# EAGLE board icyradio (EAGLE 9.5.1), part 1 of 3
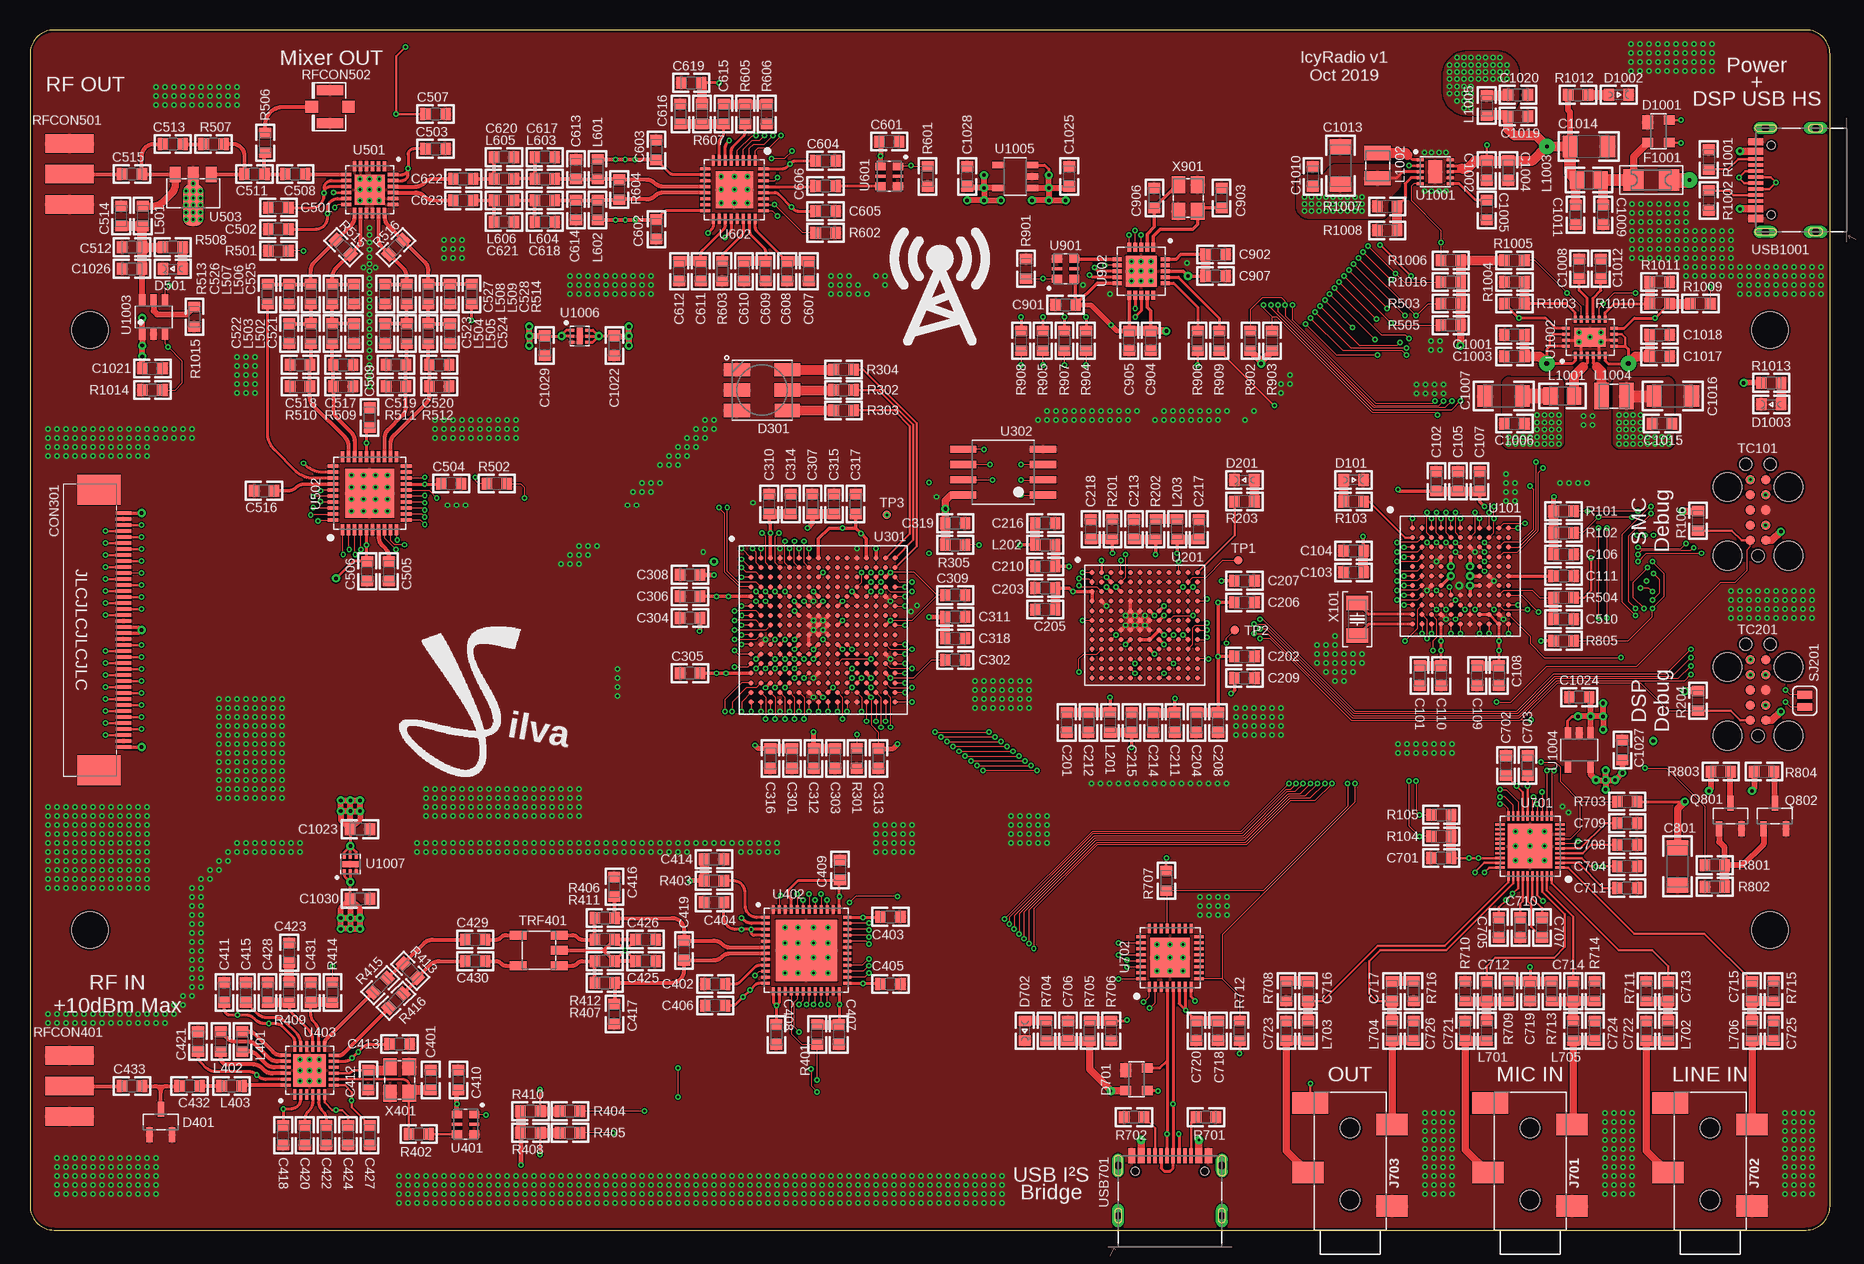
[diagram p0: board, top side]
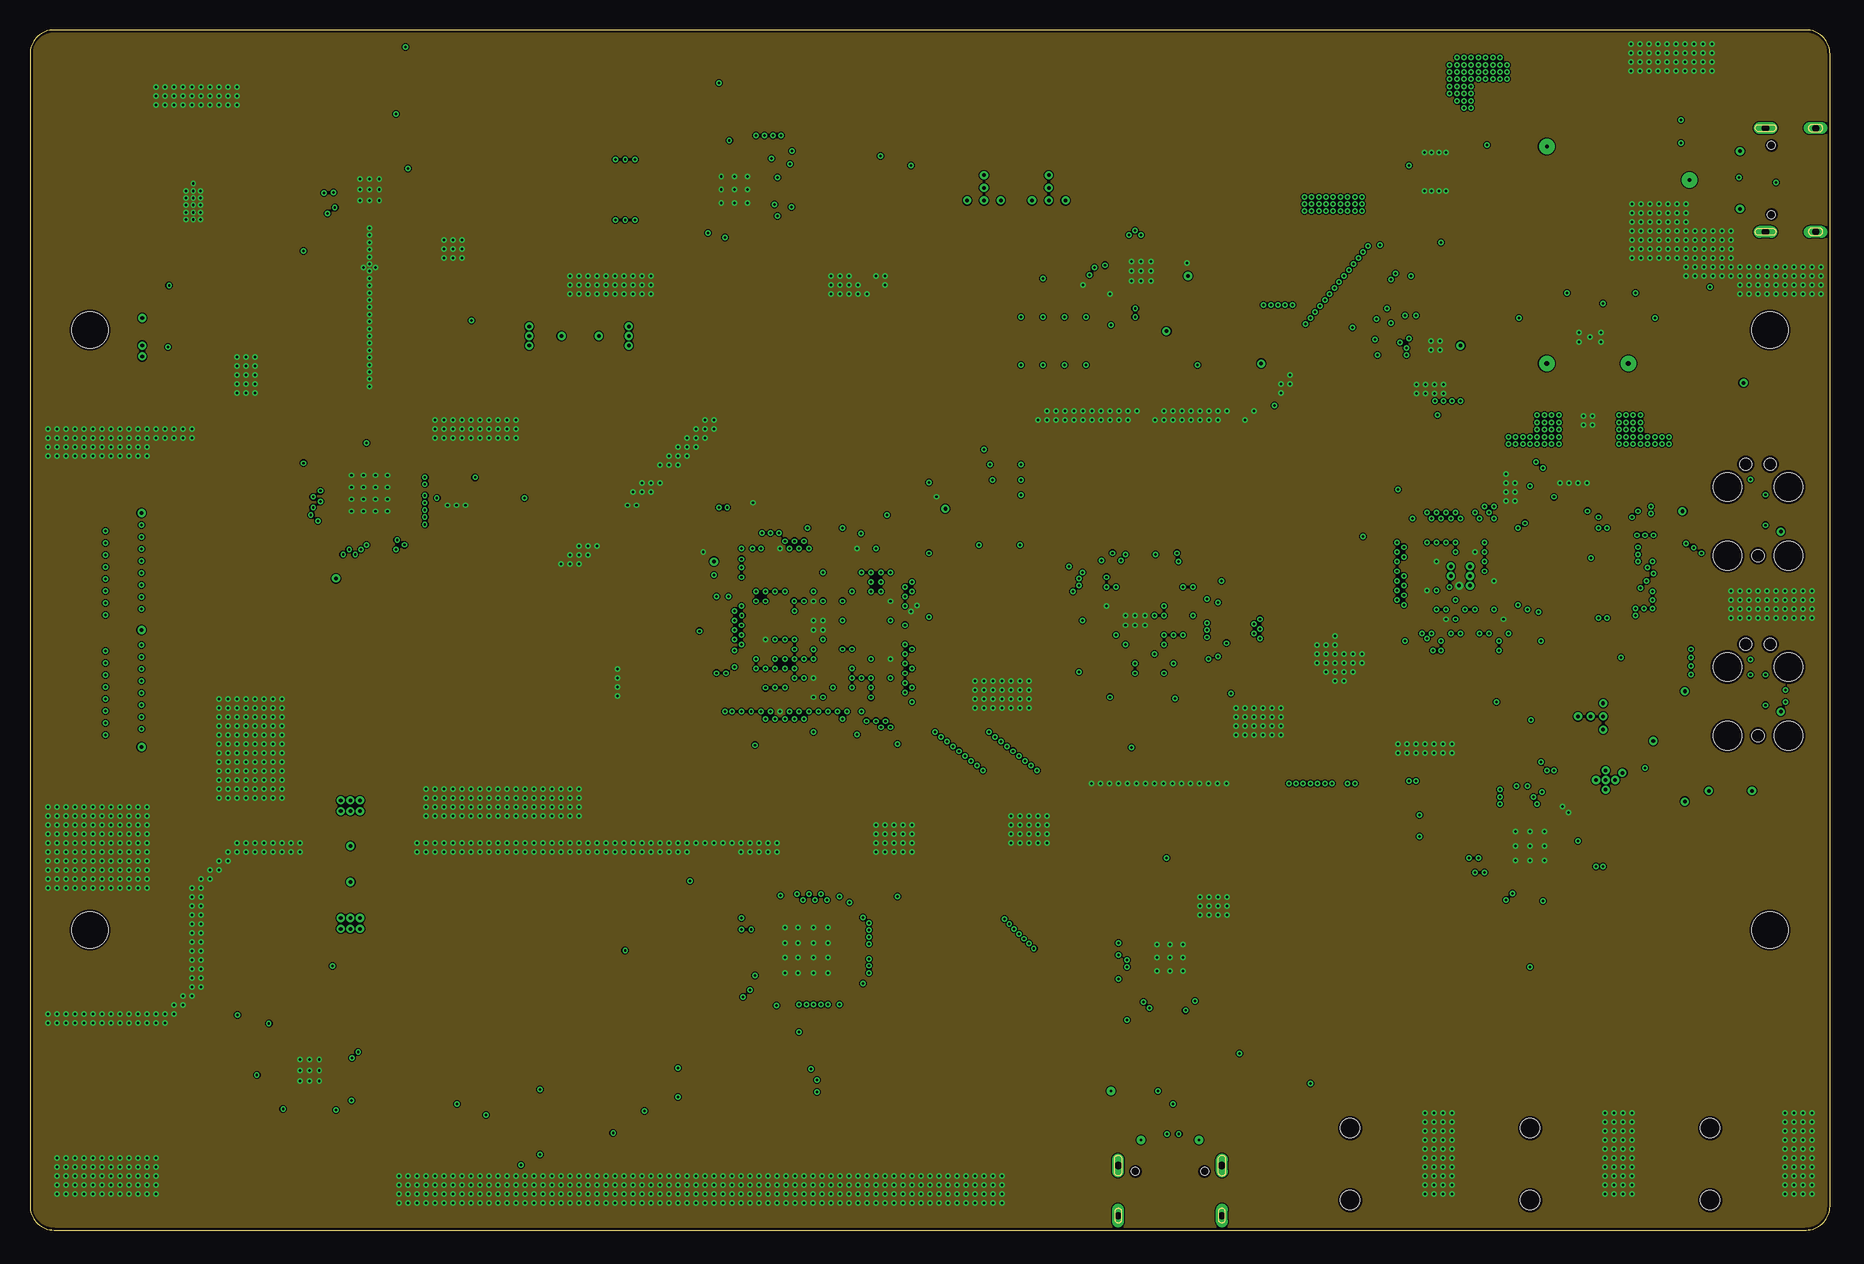
[diagram p1: board, inner layer Route2]
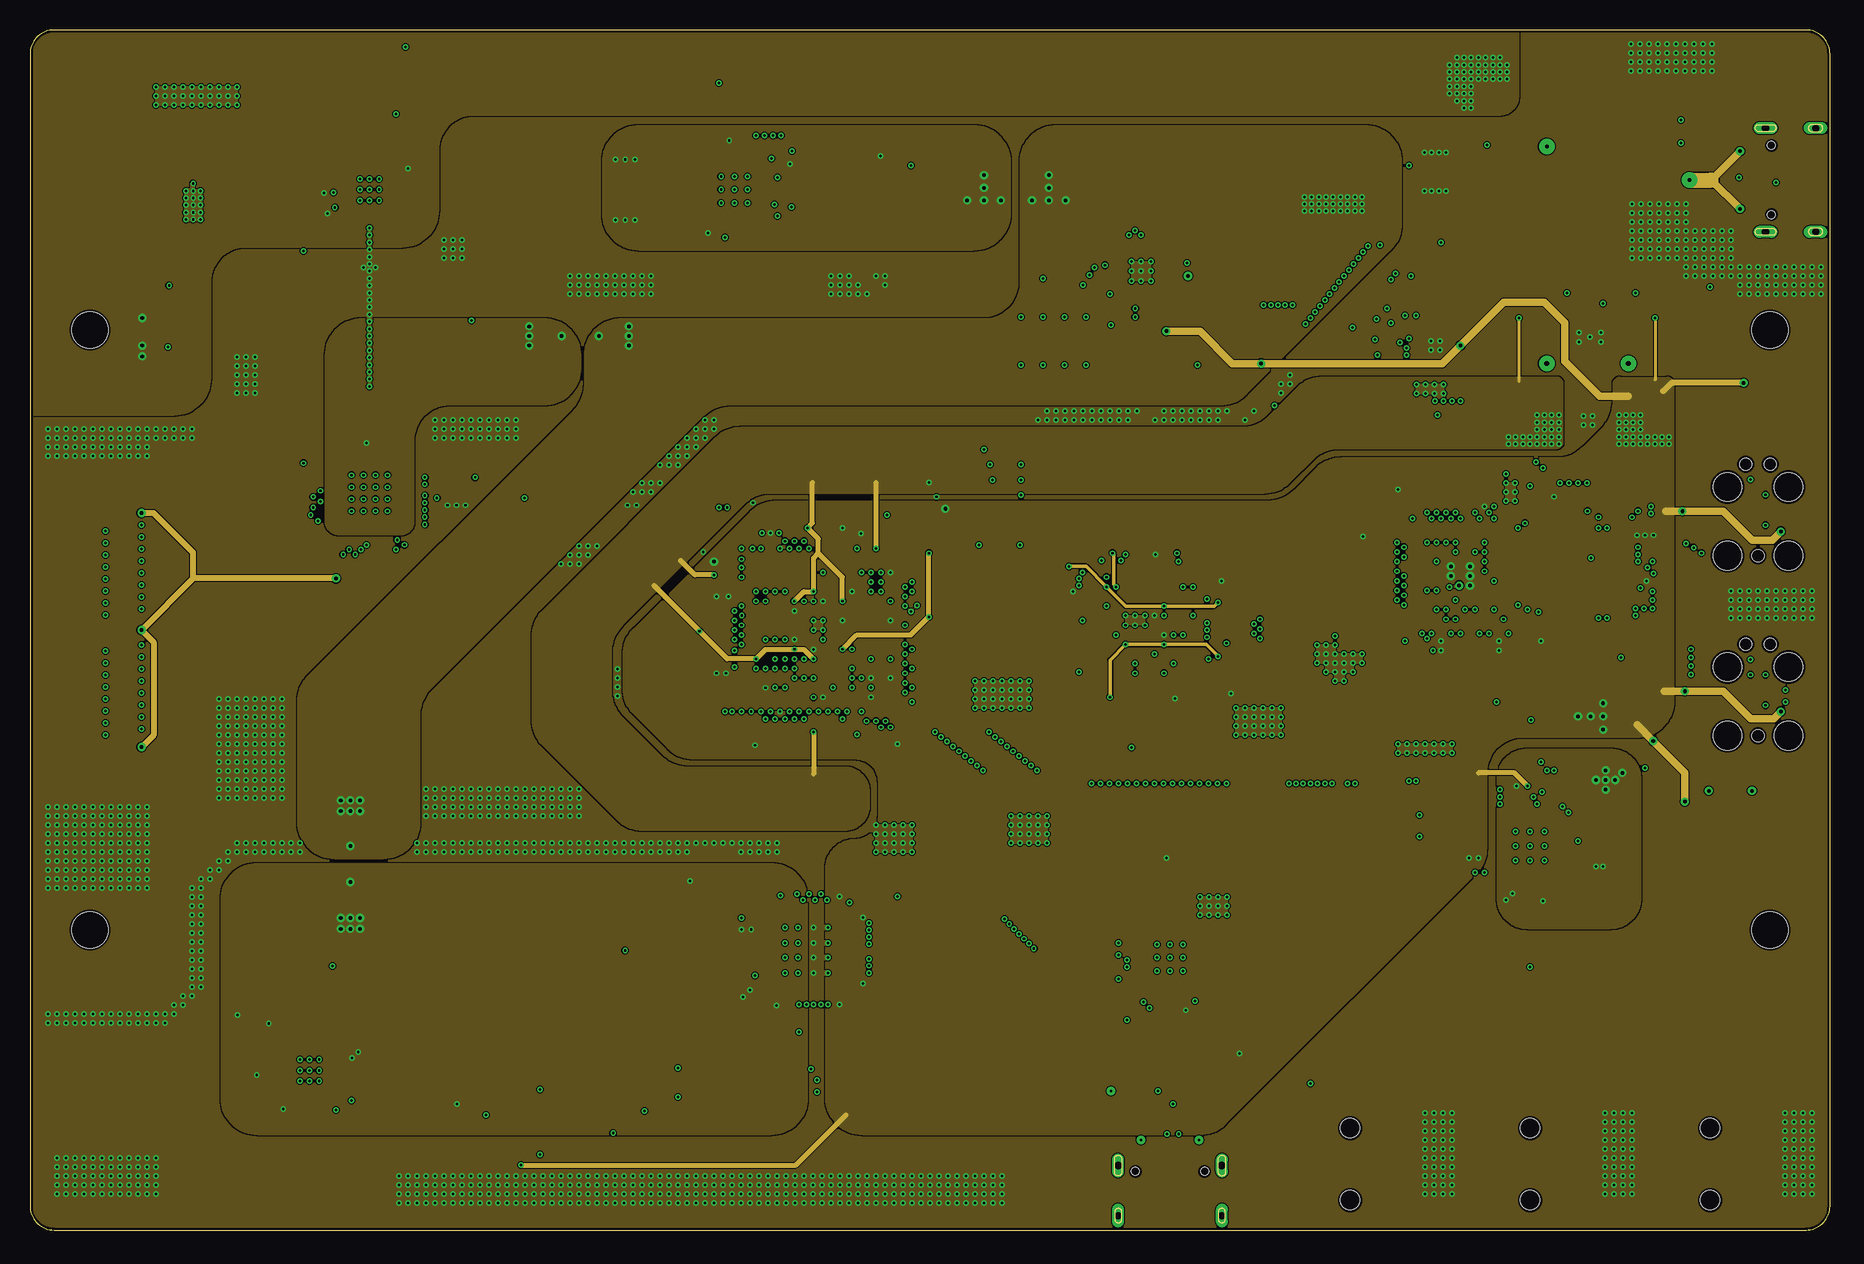
[diagram p2: board, inner layer Route15]
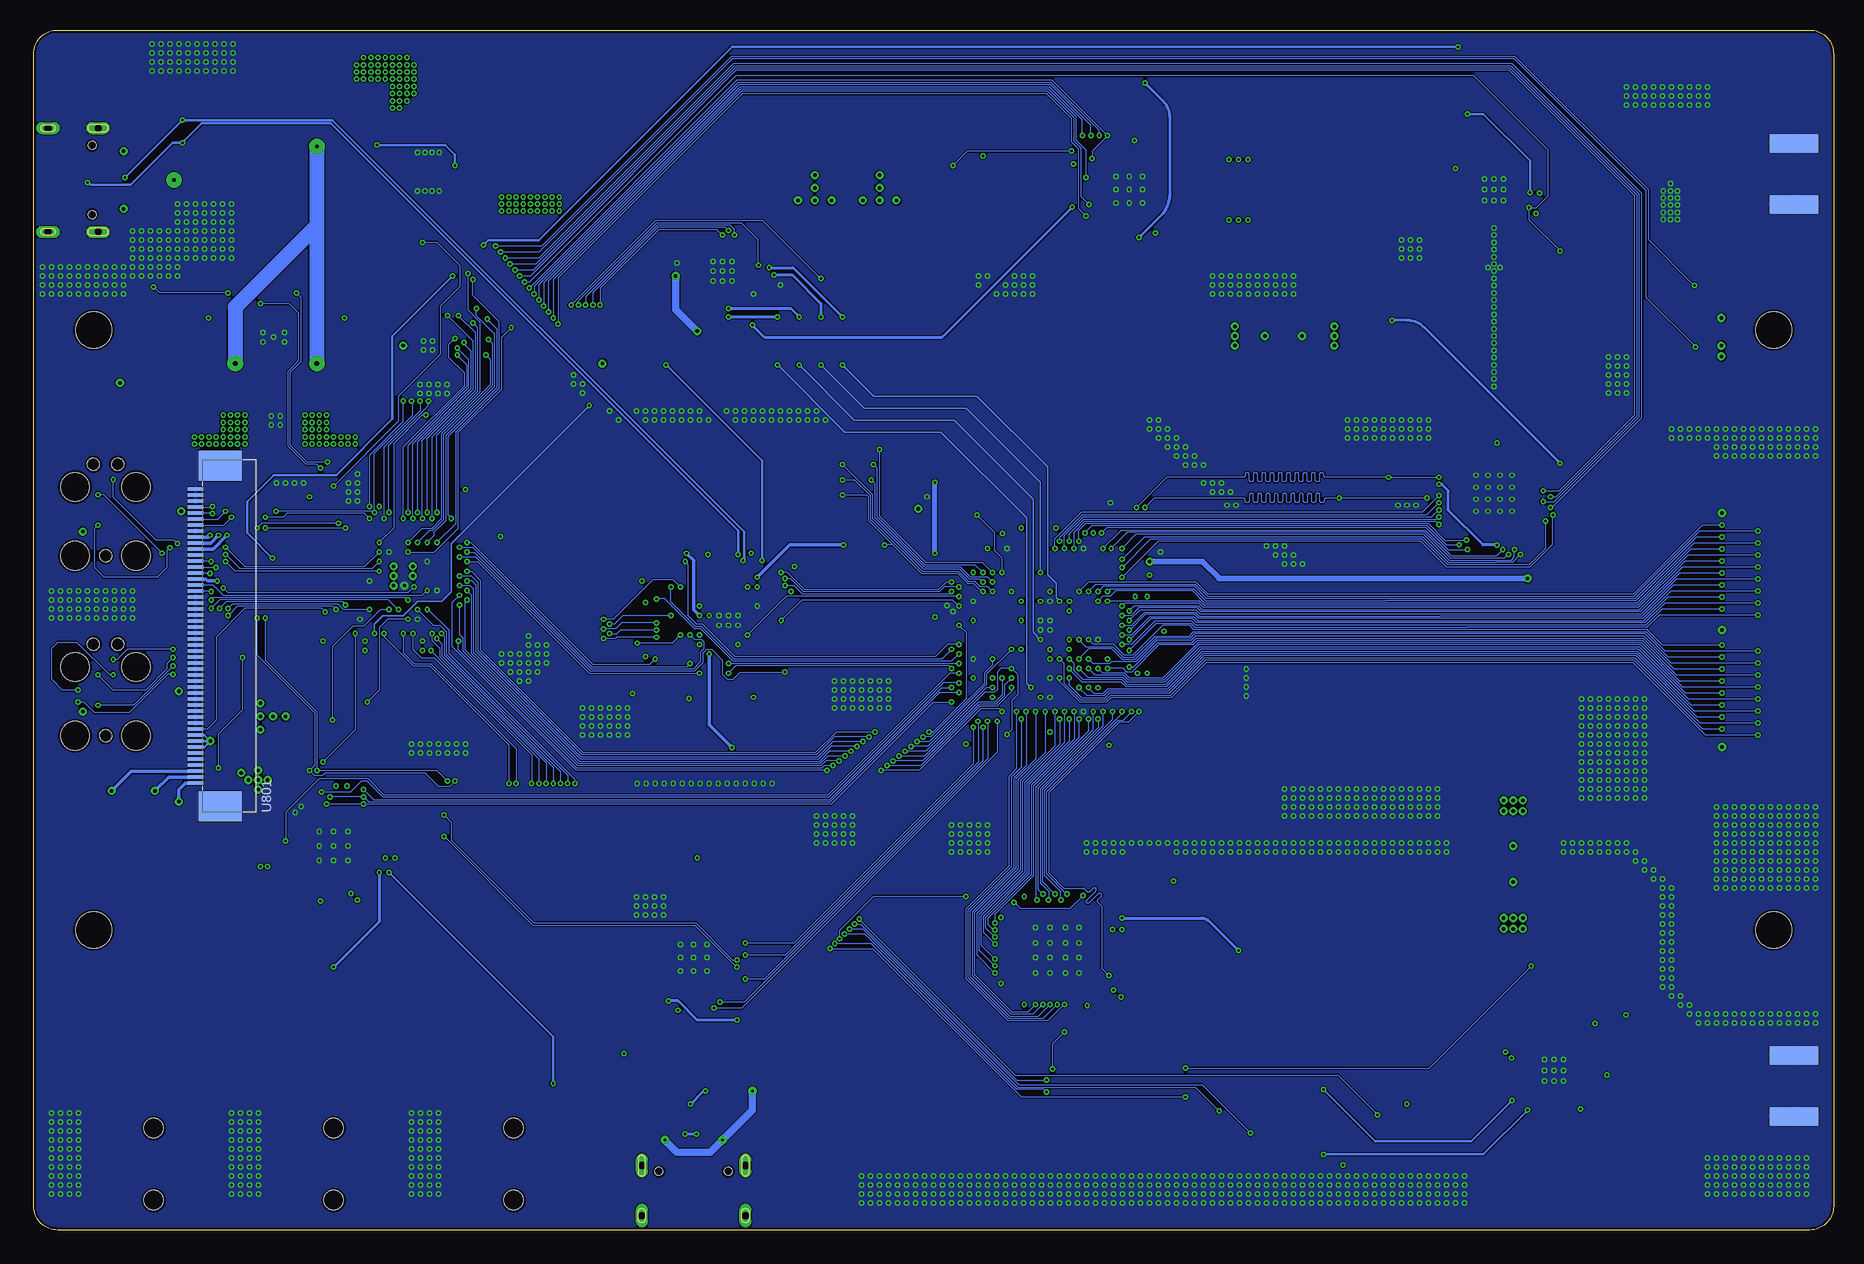
[diagram p3: board, bottom side, seen from below]

Size 150 x 100 mm. Coordinates in mm from the lower left corner, seen from the top.
Outline: 0,98 0,2 arc90 2,0 148,0 arc90 150,2 150,98 arc90 148,100 2,100 arc90 0,98
Copper layers (1+2*15+16): Top 0.035mm / dielectric 0.2mm / Route2 0.0175mm / dielectric 0.665mm / Route15 0.0175mm / dielectric 0.2mm / Bottom 0.035mm
Design rules "jlcpcb_4layer *": minimum track width 3.5mil, minimum drill 0.2mm, track to track 3.5mil, track to pad 3.5mil, pad to pad 3.5mil, via to via 5mil, smd to smd 3.5mil, copper to edge 0.2mm, drill to drill 5mil, minimum pad ring 3mil, minimum via ring 3mil, stop-mask expansion 0.075mm, vias tented up to drill 10mm, thermal gap 3.5mil
Holes 3 mm at 145,25 145,75 5,25 5,75

## Footprints (pad centres in the part's own frame; a part is rotated, then mirrored left to right if it is on the bottom)
CAP0603 = smd 0.889 x 1.016: 1 -0.819,0; 2 0.819,0
CAP1206 = smd 1.27 x 1.778: 1 -1.549,0; 2 1.549,0
FPC-40P = smd 0.3 x 1.3: 1 -9.75,3.5; 2 -9.25,3.5; 3 -8.75,3.5; 4 -8.25,3.5; 5 -7.75,3.5; 6 -7.25,3.5; 7 -6.75,3.5; 8 -6.25,3.5; 9 -5.75,3.5; 10 -5.25,3.5; 11 -4.75,3.5; 12 -4.25,3.5; 13 -3.75,3.5; 14 -3.25,3.5; 15 -2.75,3.5; 16 -2.25,3.5; 17 -1.75,3.5; 18 -1.25,3.5; 19 -0.75,3.5; 20 -0.25,3.5; 21 0.25,3.5; 22 0.75,3.5; 23 1.25,3.5; 24 1.75,3.5; 25 2.25,3.5; 26 2.75,3.5; 27 3.25,3.5; 28 3.75,3.5; 29 4.25,3.5; 30 4.75,3.5; 31 5.25,3.5; 32 5.75,3.5; 33 6.25,3.5; 34 6.75,3.5; 35 7.25,3.5; 36 7.75,3.5; 37 8.25,3.5; 38 8.75,3.5; 39 9.25,3.5; 40 9.75,3.5 | smd 2.5 x 3.6: M1 11.69,1.45; M2 -11.69,1.45
0603 = smd 0.889 x 1.016: 1 -0.819,0; 2 0.819,0
5050 = smd 2.1 x 1.1: 1 -2.1,1.7 | smd 2.2 x 1.1: 2 -2.1,0; 3 -2.1,-1.7; 4 2.1,-1.7; 5 2.1,0; 6 2.1,1.7
SOT23 = smd 1.219 x 0.533: 1 -1.067,0.94; 2 -1.067,-0.94; 3 1.067,0
SOT143 = smd 1.2 x 0.9: 1 -0.711,-0.889 | smd 0.8 x 0.9: 2 0.989,-0.889; 3 0.989,0.911; 4 -0.911,0.911
1206 = smd 1.7 x 1.803: 1 -1.472,0; 2 1.472,0
3.5TRSJACK = smd 1.8 x 2.6: 1 2,-3.5; 2 8.8,-3.5; 3 4.8,3.5 | smd 1.8 x 3: 4 10.6,3.3 | hole 1.6: 2.5,0; 8.5,0
IND0603 = smd 0.889 x 1.016: 1 -0.819,0; 2 0.819,0
IND0805 = smd 1.245 x 1.473: 1 -0.965,0; 2 0.965,0
IND2520 = smd 2.2 x 1.2: 1 0,-1.05; 2 0,1.05
RES0603 = smd 0.889 x 1.016: 1 -0.819,0; 2 0.819,0
SMA-EDGE = smd 1.524 x 4.064: GND@0 -2.54,0; GND@1 2.54,0; SIG 0,0 | smd 1.524 x 4.064 bottom: GND@2 -2.54,0; GND@3 2.54,0
U.FL = smd 2.2 x 0.85: P$1 0,1.375; P$2 0,-1.375 | smd 1.05 x 1: P$3 1.525,0; P$4 -1.525,0
SJ_S = smd 0.635 x 1.27: 1 -0.508,0; 2 0.508,0
TC2050-IDC = smd 0.787 x 0.787: 1 -2.54,-0.635; 2 -1.27,-0.635; 3 0,-0.635; 4 1.27,-0.635; 5 2.54,-0.635; 6 2.54,0.635; 7 1.27,0.635; 8 0,0.635; 9 -1.27,0.635; 10 -2.54,0.635 | hole 0.991: -3.81,0; 3.81,1.016; 3.81,-1.016 | hole 2.375: -3.81,2.54; -3.81,-2.54; 1.905,2.54; 1.905,-2.54
PAD0.7MM = smd 0.7 x 0.7: TP 0,0
TRF-SM-22 = smd 0.76 x 1.4: 1 -1.27,1.715; 2 0,1.715; 3 1.27,1.715; 4 1.27,-1.715; 5 -1.27,-1.715
BGA112 = smd 0.406 x 0.406: A1 -4,4; A2 -3.2,4; A3 -2.4,4; A4 -1.6,4; A5 -0.8,4; A6 0,4; A7 0.8,4; A8 1.6,4; A9 2.4,4; A10 3.2,4; A11 4,4; B1 -4,3.2; B2 -3.2,3.2; B3 -2.4,3.2; B4 -1.6,3.2; B5 -0.8,3.2; B6 0,3.2; B7 0.8,3.2; B8 1.6,3.2; B9 2.4,3.2; B10 3.2,3.2; B11 4,3.2; C1 -4,2.4; C2 -3.2,2.4; C3 -2.4,2.4; C4 -1.6,2.4; C5 -0.8,2.4; C6 0,2.4; C7 0.8,2.4; C8 1.6,2.4; C9 2.4,2.4; C10 3.2,2.4; C11 4,2.4; D1 -4,1.6; D2 -3.2,1.6; D3 -2.4,1.6; D4 -1.6,1.6; D5 -0.8,1.6; D6 0,1.6; D7 0.8,1.6; D8 1.6,1.6; D9 2.4,1.6; D10 3.2,1.6; D11 4,1.6; E1 -4,0.8; E2 -3.2,0.8; E3 -2.4,0.8; E4 -1.6,0.8; E8 1.6,0.8; E9 2.4,0.8; E10 3.2,0.8; E11 4,0.8; F1 -4,0; F2 -3.2,0; F3 -2.4,0; F4 -1.6,0; F8 1.6,0; F9 2.4,0; F10 3.2,0; F11 4,0; G1 -4,-0.8; G2 -3.2,-0.8; G3 -2.4,-0.8; G4 -1.6,-0.8; G8 1.6,-0.8; G9 2.4,-0.8; G10 3.2,-0.8; G11 4,-0.8; H1 -4,-1.6; H2 -3.2,-1.6; H3 -2.4,-1.6; H4 -1.6,-1.6; H5 -0.8,-1.6; H6 0,-1.6; H7 0.8,-1.6; H8 1.6,-1.6; H9 2.4,-1.6; H10 3.2,-1.6; H11 4,-1.6; J1 -4,-2.4; J2 -3.2,-2.4; J3 -2.4,-2.4; J4 -1.6,-2.4; J5 -0.8,-2.4; J6 0,-2.4; J7 0.8,-2.4; J8 1.6,-2.4; J9 2.4,-2.4; J10 3.2,-2.4; J11 4,-2.4; K1 -4,-3.2; K2 -3.2,-3.2; K3 -2.4,-3.2; K4 -1.6,-3.2; K5 -0.8,-3.2; K6 0,-3.2; K7 0.8,-3.2; K8 1.6,-3.2; K9 2.4,-3.2; K10 3.2,-3.2; K11 4,-3.2; L1 -4,-4; L2 -3.2,-4; L3 -2.4,-4; L4 -1.6,-4; L5 -0.8,-4; L6 0,-4; L7 0.8,-4; L8 1.6,-4; L9 2.4,-4; L10 3.2,-4; L11 4,-4
LFBGA144 = smd 0.406 x 0.406: A1 -4.4,4.4; A2 -3.6,4.4; A3 -2.8,4.4; A4 -2,4.4; A5 -1.2,4.4; A6 -0.4,4.4; A7 0.4,4.4; A8 1.2,4.4; A9 2,4.4; A10 2.8,4.4; A11 3.6,4.4; A12 4.4,4.4; B1 -4.4,3.6; B2 -3.6,3.6; B3 -2.8,3.6; B4 -2,3.6; B5 -1.2,3.6; B6 -0.4,3.6; B7 0.4,3.6; B8 1.2,3.6; B9 2,3.6; B10 2.8,3.6; B11 3.6,3.6; B12 4.4,3.6; C1 -4.4,2.8; C2 -3.6,2.8; C3 -2.8,2.8; C4 -2,2.8; C5 -1.2,2.8; C6 -0.4,2.8; C7 0.4,2.8; C8 1.2,2.8; C9 2,2.8; C10 2.8,2.8; C11 3.6,2.8; C12 4.4,2.8; D1 -4.4,2; D2 -3.6,2; D3 -2.8,2; D4 -2,2; D5 -1.2,2; D6 -0.4,2; D7 0.4,2; D8 1.2,2; D9 2,2; D10 2.8,2; D11 3.6,2; D12 4.4,2; E1 -4.4,1.2; E2 -3.6,1.2; E3 -2.8,1.2; E4 -2,1.2; E5 -1.2,1.2; E6 -0.4,1.2; E7 0.4,1.2; E8 1.2,1.2; E9 2,1.2; E10 2.8,1.2; E11 3.6,1.2; E12 4.4,1.2; F1 -4.4,0.4; F2 -3.6,0.4; F3 -2.8,0.4; F4 -2,0.4; F5 -1.2,0.4; F6 -0.4,0.4; F7 0.4,0.4; F8 1.2,0.4; F9 2,0.4; F10 2.8,0.4; F11 3.6,0.4; F12 4.4,0.4; G1 -4.4,-0.4; G2 -3.6,-0.4; G3 -2.8,-0.4; G4 -2,-0.4; G5 -1.2,-0.4; G6 -0.4,-0.4; G7 0.4,-0.4; G8 1.2,-0.4; G9 2,-0.4; G10 2.8,-0.4; G11 3.6,-0.4; G12 4.4,-0.4; H1 -4.4,-1.2; H2 -3.6,-1.2; H3 -2.8,-1.2; H4 -2,-1.2; H5 -1.2,-1.2; H6 -0.4,-1.2; H7 0.4,-1.2; H8 1.2,-1.2; H9 2,-1.2; H10 2.8,-1.2; H11 3.6,-1.2; H12 4.4,-1.2; J1 -4.4,-2; J2 -3.6,-2; J3 -2.8,-2; J4 -2,-2; J5 -1.2,-2; J6 -0.4,-2; J7 0.4,-2; J8 1.2,-2; J9 2,-2; J10 2.8,-2; J11 3.6,-2; J12 4.4,-2; K1 -4.4,-2.8; K2 -3.6,-2.8; K3 -2.8,-2.8; K4 -2,-2.8; K5 -1.2,-2.8; K6 -0.4,-2.8; K7 0.4,-2.8; K8 1.2,-2.8; K9 2,-2.8; K10 2.8,-2.8; K11 3.6,-2.8; K12 4.4,-2.8; L1 -4.4,-3.6; L2 -3.6,-3.6; L3 -2.8,-3.6; L4 -2,-3.6; L5 -1.2,-3.6; L6 -0.4,-3.6; L7 0.4,-3.6; L8 1.2,-3.6; L9 2,-3.6; L10 2.8,-3.6; L11 3.6,-3.6; L12 4.4,-3.6; M1 -4.4,-4.4; M2 -3.6,-4.4; M3 -2.8,-4.4; M4 -2,-4.4; M5 -1.2,-4.4; M6 -0.4,-4.4; M7 0.4,-4.4; M8 1.2,-4.4; M9 2,-4.4; M10 2.8,-4.4; M11 3.6,-4.4; M12 4.4,-4.4
CABGA256 = smd 0.406 x 0.406: A1 -6,6; A2 -5.2,6; A3 -4.4,6; A4 -3.6,6; A5 -2.8,6; A6 -2,6; A7 -1.2,6; A8 -0.4,6; A9 0.4,6; A10 1.2,6; A11 2,6; A12 2.8,6; A13 3.6,6; A14 4.4,6; A15 5.2,6; A16 6,6; B1 -6,5.2; B2 -5.2,5.2; B3 -4.4,5.2; B4 -3.6,5.2; B5 -2.8,5.2; B6 -2,5.2; B7 -1.2,5.2; B8 -0.4,5.2; B9 0.4,5.2; B10 1.2,5.2; B11 2,5.2; B12 2.8,5.2; B13 3.6,5.2; B14 4.4,5.2; B15 5.2,5.2; B16 6,5.2; C1 -6,4.4; C2 -5.2,4.4; C3 -4.4,4.4; C4 -3.6,4.4; C5 -2.8,4.4; C6 -2,4.4; C7 -1.2,4.4; C8 -0.4,4.4; C9 0.4,4.4; C10 1.2,4.4; C11 2,4.4; C12 2.8,4.4; C13 3.6,4.4; C14 4.4,4.4; C15 5.2,4.4; C16 6,4.4; D1 -6,3.6; D2 -5.2,3.6; D3 -4.4,3.6; D4 -3.6,3.6; D5 -2.8,3.6; D6 -2,3.6; D7 -1.2,3.6; D8 -0.4,3.6; D9 0.4,3.6; D10 1.2,3.6; D11 2,3.6; D12 2.8,3.6; D13 3.6,3.6; D14 4.4,3.6; D15 5.2,3.6; D16 6,3.6; E1 -6,2.8; E2 -5.2,2.8; E3 -4.4,2.8; E4 -3.6,2.8; E5 -2.8,2.8; E6 -2,2.8; E7 -1.2,2.8; E8 -0.4,2.8; E9 0.4,2.8; E10 1.2,2.8; E11 2,2.8; E12 2.8,2.8; E13 3.6,2.8; E14 4.4,2.8; E15 5.2,2.8; E16 6,2.8; F1 -6,2; F2 -5.2,2; F3 -4.4,2; F4 -3.6,2; F5 -2.8,2; F6 -2,2; F7 -1.2,2; F8 -0.4,2; F9 0.4,2; F10 1.2,2; F11 2,2; F12 2.8,2; F13 3.6,2; F14 4.4,2; F15 5.2,2; F16 6,2; G1 -6,1.2; G2 -5.2,1.2; G3 -4.4,1.2; G4 -3.6,1.2; G5 -2.8,1.2; G6 -2,1.2; G7 -1.2,1.2; G8 -0.4,1.2; G9 0.4,1.2; G10 1.2,1.2; G11 2,1.2; G12 2.8,1.2; G13 3.6,1.2; G14 4.4,1.2; G15 5.2,1.2; G16 6,1.2; H1 -6,0.4; H2 -5.2,0.4; H3 -4.4,0.4; H4 -3.6,0.4; H5 -2.8,0.4; H6 -2,0.4; H7 -1.2,0.4; H8 -0.4,0.4; H9 0.4,0.4; H10 1.2,0.4; H11 2,0.4; H12 2.8,0.4; H13 3.6,0.4; H14 4.4,0.4; H15 5.2,0.4; H16 6,0.4; J1 -6,-0.4; J2 -5.2,-0.4; J3 -4.4,-0.4; J4 -3.6,-0.4; J5 -2.8,-0.4; J6 -2,-0.4; J7 -1.2,-0.4; J8 -0.4,-0.4; J9 0.4,-0.4; J10 1.2,-0.4; J11 2,-0.4; J12 2.8,-0.4; J13 3.6,-0.4; J14 4.4,-0.4; J15 5.2,-0.4; J16 6,-0.4; K1 -6,-1.2; K2 -5.2,-1.2; K3 -4.4,-1.2; K4 -3.6,-1.2; K5 -2.8,-1.2; K6 -2,-1.2; K7 -1.2,-1.2; K8 -0.4,-1.2; K9 0.4,-1.2; K10 1.2,-1.2; K11 2,-1.2; K12 2.8,-1.2; K13 3.6,-1.2; K14 4.4,-1.2; K15 5.2,-1.2; K16 6,-1.2; L1 -6,-2; L2 -5.2,-2; L3 -4.4,-2; L4 -3.6,-2; L5 -2.8,-2; L6 -2,-2; L7 -1.2,-2; L8 -0.4,-2; L9 0.4,-2; L10 1.2,-2; L11 2,-2; L12 2.8,-2; L13 3.6,-2; L14 4.4,-2; L15 5.2,-2; L16 6,-2; M1 -6,-2.8; M2 -5.2,-2.8; M3 -4.4,-2.8; M4 -3.6,-2.8; M5 -2.8,-2.8; M6 -2,-2.8; M7 -1.2,-2.8; M8 -0.4,-2.8; M9 0.4,-2.8; M10 1.2,-2.8; M11 2,-2.8; M12 2.8,-2.8; M13 3.6,-2.8; M14 4.4,-2.8; M15 5.2,-2.8; M16 6,-2.8; N1 -6,-3.6; N2 -5.2,-3.6; N3 -4.4,-3.6; N4 -3.6,-3.6; N5 -2.8,-3.6; N6 -2,-3.6; N7 -1.2,-3.6; N8 -0.4,-3.6; N9 0.4,-3.6; N10 1.2,-3.6; N11 2,-3.6; N12 2.8,-3.6; N13 3.6,-3.6; N14 4.4,-3.6; N15 5.2,-3.6; N16 6,-3.6; P1 -6,-4.4; P2 -5.2,-4.4; P3 -4.4,-4.4; P4 -3.6,-4.4; P5 -2.8,-4.4; P6 -2,-4.4; P7 -1.2,-4.4; P8 -0.4,-4.4; P9 0.4,-4.4; P10 1.2,-4.4; P11 2,-4.4; P12 2.8,-4.4; P13 3.6,-4.4; P14 4.4,-4.4; P15 5.2,-4.4; P16 6,-4.4; R1 -6,-5.2; R2 -5.2,-5.2; R3 -4.4,-5.2; R4 -3.6,-5.2; R5 -2.8,-5.2; R6 -2,-5.2; R7 -1.2,-5.2; R8 -0.4,-5.2; R9 0.4,-5.2; R10 1.2,-5.2; R11 2,-5.2; R12 2.8,-5.2; R13 3.6,-5.2; R14 4.4,-5.2; R15 5.2,-5.2; R16 6,-5.2; T1 -6,-6; T2 -5.2,-6; T3 -4.4,-6; T4 -3.6,-6; T5 -2.8,-6; T6 -2,-6; T7 -1.2,-6; T8 -0.4,-6; T9 0.4,-6; T10 1.2,-6; T11 2,-6; T12 2.8,-6; T13 3.6,-6; T14 4.4,-6; T15 5.2,-6; T16 6,-6
WSOIC8 = smd 0.6 x 2.2: 1 -1.905,-3.33; 2 -0.635,-3.33; 3 0.635,-3.33; 4 1.905,-3.33; 5 1.905,3.33; 6 0.635,3.33; 7 -0.635,3.33; 8 -1.905,3.33
VDFN6 = smd 0.65 x 0.85: 1 -0.83,0.725; 3 0.83,0.725; 4 0.83,-0.725; 6 -0.83,-0.725 | smd 0.25 x 0.85: 2 0,0.725; 5 0,-0.725
QFN48 = smd 0.7 x 0.25: 1 -3.4,2.75; 2 -3.4,2.25; 3 -3.4,1.75; 4 -3.4,1.25; 5 -3.4,0.75; 6 -3.4,0.25; 7 -3.4,-0.25; 8 -3.4,-0.75; 9 -3.4,-1.25; 10 -3.4,-1.75; 11 -3.4,-2.25; 12 -3.4,-2.75; 25 3.4,-2.75; 26 3.4,-2.25; 27 3.4,-1.75; 28 3.4,-1.25; 29 3.4,-0.75; 30 3.4,-0.25; 31 3.4,0.25; 32 3.4,0.75; 33 3.4,1.25; 34 3.4,1.75; 35 3.4,2.25; 36 3.4,2.75 | smd 0.25 x 0.7: 13 -2.75,-3.4; 14 -2.25,-3.4; 15 -1.75,-3.4; 16 -1.25,-3.4; 17 -0.75,-3.4; 18 -0.25,-3.4; 19 0.25,-3.4; 20 0.75,-3.4; 21 1.25,-3.4; 22 1.75,-3.4; 23 2.25,-3.4; 24 2.75,-3.4; 37 2.75,3.4; 38 2.25,3.4; 39 1.75,3.4; 40 1.25,3.4; 41 0.75,3.4; 42 0.25,3.4; 43 -0.25,3.4; 44 -0.75,3.4; 45 -1.25,3.4; 46 -1.75,3.4; 47 -2.25,3.4; 48 -2.75,3.4 | smd 5.15 x 5.15: 49 0,0
QFN24 = smd 0.25 x 0.85: 1 -1.25,-2; 2 -0.75,-2; 3 -0.25,-2; 4 0.25,-2; 5 0.75,-2; 6 1.25,-2; 13 1.25,2; 14 0.75,2; 15 0.25,2; 16 -0.25,2; 17 -0.75,2; 18 -1.25,2 | smd 0.85 x 0.25: 7 2,-1.25; 8 2,-0.75; 9 2,-0.25; 10 2,0.25; 11 2,0.75; 12 2,1.25; 19 -2,1.25; 20 -2,0.75; 21 -2,0.25; 22 -2,-0.25; 23 -2,-0.75; 24 -2,-1.25 | smd 2.7 x 2.7: 33 0,0
QFN24' = smd 0.3 x 0.85: 1 -1.25,-1.95; 2 -0.75,-1.95; 3 -0.25,-1.95; 4 0.25,-1.95; 5 0.75,-1.95; 6 1.25,-1.95; 13 1.25,1.95; 14 0.75,1.95; 15 0.25,1.95; 16 -0.25,1.95; 17 -0.75,1.95; 18 -1.25,1.95 | smd 0.85 x 0.3: 7 1.95,-1.25; 8 1.95,-0.75; 9 1.95,-0.25; 10 1.95,0.25; 11 1.95,0.75; 12 1.95,1.25; 19 -1.95,1.25; 20 -1.95,0.75; 21 -1.95,0.25; 22 -1.95,-0.25; 23 -1.95,-0.75; 24 -1.95,-1.25 | smd 2.5 x 2.5: 33 0,0
QFN40 = smd 0.9 x 0.29: 1 -3.05,2.25; 2 -3.05,1.75; 3 -3.05,1.25; 4 -3.05,0.75; 5 -3.05,0.25; 6 -3.05,-0.25; 7 -3.05,-0.75; 8 -3.05,-1.25; 9 -3.05,-1.75; 10 -3.05,-2.25; 21 3.05,-2.25; 22 3.05,-1.75; 23 3.05,-1.25; 24 3.05,-0.75; 25 3.05,-0.25; 26 3.05,0.25; 27 3.05,0.75; 28 3.05,1.25; 29 3.05,1.75; 30 3.05,2.25 | smd 0.29 x 0.9: 11 -2.25,-3.05; 12 -1.75,-3.05; 13 -1.25,-3.05; 14 -0.75,-3.05; 15 -0.25,-3.05; 16 0.25,-3.05; 17 0.75,-3.05; 18 1.25,-3.05; 19 1.75,-3.05; 20 2.25,-3.05; 31 2.25,3.05; 32 1.75,3.05; 33 1.25,3.05; 34 0.75,3.05; 35 0.25,3.05; 36 -0.25,3.05; 37 -0.75,3.05; 38 -1.25,3.05; 39 -1.75,3.05; 40 -2.25,3.05 | smd 4.1 x 4.1: 41 0,0
SOT89 = smd 0.9 x 1.3: 1 -1.5,-1.562; 3 1.5,-1.562 | smd 0.9 x 1.5: 2 0,-1.462 | smd 1.733 x 3.5: 4 0,0.988
QFN32 = smd 0.86 x 0.26: 1 -2.435,1.75; 2 -2.435,1.25; 3 -2.435,0.75; 4 -2.435,0.25; 5 -2.435,-0.25; 6 -2.435,-0.75; 7 -2.435,-1.25; 8 -2.435,-1.75; 17 2.435,-1.75; 18 2.435,-1.25; 19 2.435,-0.75; 20 2.435,-0.25; 21 2.435,0.25; 22 2.435,0.75; 23 2.435,1.25; 24 2.435,1.75 | smd 0.26 x 0.86: 9 -1.75,-2.435; 10 -1.25,-2.435; 11 -0.75,-2.435; 12 -0.25,-2.435; 13 0.25,-2.435; 14 0.75,-2.435; 15 1.25,-2.435; 16 1.75,-2.435; 25 1.75,2.435; 26 1.25,2.435; 27 0.75,2.435; 28 0.25,2.435; 29 -0.25,2.435; 30 -0.75,2.435; 31 -1.25,2.435; 32 -1.75,2.435 | smd 3.1 x 3.1: 33 0,0
QFN40' = smd 0.8 x 0.2: 1 -2.5,1.8; 2 -2.5,1.4; 3 -2.5,1; 4 -2.5,0.6; 5 -2.5,0.2; 6 -2.5,-0.2; 7 -2.5,-0.6; 8 -2.5,-1; 9 -2.5,-1.4; 10 -2.5,-1.8; 21 2.5,-1.8; 22 2.5,-1.4; 23 2.5,-1; 24 2.5,-0.6; 25 2.5,-0.2; 26 2.5,0.2; 27 2.5,0.6; 28 2.5,1; 29 2.5,1.4; 30 2.5,1.8 | smd 0.2 x 0.8: 11 -1.8,-2.5; 12 -1.4,-2.5; 13 -1,-2.5; 14 -0.6,-2.5; 15 -0.2,-2.5; 16 0.2,-2.5; 17 0.6,-2.5; 18 1,-2.5; 19 1.4,-2.5; 20 1.8,-2.5; 31 1.8,2.5; 32 1.4,2.5; 33 1,2.5; 34 0.6,2.5; 35 0.2,2.5; 36 -0.2,2.5; 37 -0.6,2.5; 38 -1,2.5; 39 -1.4,2.5; 40 -1.8,2.5 | smd 3.7 x 3.7: 41 0,0
QFN32' = smd 0.8 x 0.25: 1 -2.425,1.75; 2 -2.425,1.25; 3 -2.425,0.75; 4 -2.425,0.25; 5 -2.425,-0.25; 6 -2.425,-0.75; 7 -2.425,-1.25; 8 -2.425,-1.75; 17 2.425,-1.75; 18 2.425,-1.25; 19 2.425,-0.75; 20 2.425,-0.25; 21 2.425,0.25; 22 2.425,0.75; 23 2.425,1.25; 24 2.425,1.75 | smd 0.25 x 0.8: 9 -1.75,-2.425; 10 -1.25,-2.425; 11 -0.75,-2.425; 12 -0.25,-2.425; 13 0.25,-2.425; 14 0.75,-2.425; 15 1.25,-2.425; 16 1.75,-2.425; 25 1.75,2.425; 26 1.25,2.425; 27 0.75,2.425; 28 0.25,2.425; 29 -0.25,2.425; 30 -0.75,2.425; 31 -1.25,2.425; 32 -1.75,2.425 | smd 3.3 x 3.3: 33 0,0
FPC-50P = smd 0.3 x 1.3: 1 -12.25,3.5; 2 -11.75,3.5; 3 -11.25,3.5; 4 -10.75,3.5; 5 -10.25,3.5; 6 -9.75,3.5; 7 -9.25,3.5; 8 -8.75,3.5; 9 -8.25,3.5; 10 -7.75,3.5; 11 -7.25,3.5; 12 -6.75,3.5; 13 -6.25,3.5; 14 -5.75,3.5; 15 -5.25,3.5; 16 -4.75,3.5; 17 -4.25,3.5; 18 -3.75,3.5; 19 -3.25,3.5; 20 -2.75,3.5; 21 -2.25,3.5; 22 -1.75,3.5; 23 -1.25,3.5; 24 -0.75,3.5; 25 -0.25,3.5; 26 0.25,3.5; 27 0.75,3.5; 28 1.25,3.5; 29 1.75,3.5; 30 2.25,3.5; 31 2.75,3.5; 32 3.25,3.5; 33 3.75,3.5; 34 4.25,3.5; 35 4.75,3.5; 36 5.25,3.5; 37 5.75,3.5; 38 6.25,3.5; 39 6.75,3.5; 40 7.25,3.5; 41 7.75,3.5; 42 8.25,3.5; 43 8.75,3.5; 44 9.25,3.5; 45 9.75,3.5; 46 10.25,3.5; 47 10.75,3.5; 48 11.25,3.5; 49 11.75,3.5; 50 12.25,3.5 | smd 2.5 x 3.6: M1 14.19,1.45; M2 -14.19,1.45
QFN20 = smd 0.75 x 0.3: 1 -2,1; 2 -2,0.5; 3 -2,0; 4 -2,-0.5; 5 -2,-1; 11 2,-1; 12 2,-0.5; 13 2,0; 14 2,0.5; 15 2,1 | smd 0.3 x 0.75: 6 -1,-2; 7 -0.5,-2; 8 0,-2; 9 0.5,-2; 10 1,-2; 16 1,2; 17 0.5,2; 18 0,2; 19 -0.5,2; 20 -1,2 | smd 2.6 x 2.6: 21 0,0
DFN10 = smd 0.6 x 0.25: 1 -1.25,1; 2 -1.25,0.5; 3 -1.25,0; 4 -1.25,-0.5; 5 -1.25,-1; 6 1.25,-1; 7 1.25,-0.5; 8 1.25,0; 9 1.25,0.5; 10 1.25,1 | smd 1.2 x 1.9: 11 0,0
VQFN20 = smd 0.6 x 0.25: 1 -1.5,1.25; 2 -1.5,0.75; 3 -1.5,0.25; 4 -1.5,-0.25; 5 -1.5,-0.75; 6 -1.5,-1.25; 11 1.5,-1.25; 12 1.5,-0.75; 13 1.5,-0.25; 14 1.5,0.25; 15 1.5,0.75; 16 1.5,1.25 | smd 0.25 x 0.6: 7 -0.75,-2; 8 -0.25,-2; 9 0.25,-2; 10 0.75,-2; 17 0.75,2; 18 0.25,2; 19 -0.25,2; 20 -0.75,2 | smd 1.6 x 2.6: 21 0,0
SOT23-6 = smd 1 x 0.55: 1 -1.4,0.95; 2 -1.4,0; 3 -1.4,-0.95; 4 1.4,-0.95; 5 1.4,0; 6 1.4,0.95
SOT23-5 = smd 1 x 0.55: 1 -1.4,0.95; 2 -1.4,0; 3 -1.4,-0.95; 4 1.4,-0.95; 5 1.4,0.95
DFN6 = smd 0.25 x 0.4: 1 -0.5,-0.65; 2 0,-0.65; 3 0.5,-0.65; 4 0.5,0.65; 5 0,0.65; 6 -0.5,0.65 | smd 1.4 x 0.5: 7 0,0
USB-C-16P-SMD-FLAT-SIDE-TYPE-2 = smd 1.25 x 0.6: A1/B12 5,3.2; A4/B9 5,2.4; B1/A12 5,-3.2; B4/A9 5,-2.4 | smd 1.25 x 0.3: A5 5,1.25; A6 5,0.25; A7 5,-0.25; A8 5,-1.25; B5 5,-1.75; B6 5,-0.75; B7 5,0.75; B8 5,1.75 | drill 0.6 pad 1 long: SHIELD@0 0,4.32; SHIELD@1 4.18,4.32; SHIELD@2 4.18,-4.32; SHIELD@3 0,-4.32 | hole 0.65: 3.68,2.89; 3.68,-2.89
2-SMD-3215 = smd 1.2 x 1.8: 1 -1.35,0; 2 1.35,0
4-SMD-3225 = smd 1.4 x 1.15: 1 -1.1,0.8; 2 1.1,0.8; 3 1.1,-0.8; 4 -1.1,-0.8

## Placement (x,y rotation side)
C101  100nF  [CAP0603]  115.8,46.2 270 top
C102  100nF  [CAP0603]  117.2,62.4 90 top
C103  100nF  [CAP0603]  110.3,54.8 180 top
C104  100nF  [CAP0603]  110.3,56.6 180 top
C105  100nF  [CAP0603]  119,62.4 90 top
C106  100nF  [CAP0603]  127.8,56.3 0 top
C107  100nF  [CAP0603]  120.8,62.4 90 top
C108  100nF  [CAP0603]  122.4,46.2 270 top
C109  100nF  [CAP0603]  120.6,46.2 270 top
C110  100nF  [CAP0603]  117.6,46.2 270 top
C111  1uF  [CAP0603]  127.8,54.5 0 top
C201  1uF  [CAP0603]  86.4,42.3 270 top
C202  100nF  [CAP0603]  101.2,47.8 0 top
C203  100nF  [CAP0603]  84.6,53.5 180 top
C204  100nF  [CAP0603]  97.2,42.3 270 top
C205  100nF  [CAP0603]  84.6,51.7 180 top
C206  100nF  [CAP0603]  101.2,52.3 0 top
C207  100nF  [CAP0603]  101.2,54.1 0 top
C208  100nF  [CAP0603]  99,42.3 270 top
C209  100nF  [CAP0603]  101.2,46 0 top
C210  100nF  [CAP0603]  84.6,55.3 180 top
C211  100nF  [CAP0603]  95.4,42.3 270 top
C212  100nF  [CAP0603]  88.2,42.3 270 top
C213  100nF  [CAP0603]  92,58.4 90 top
C214  100nF  [CAP0603]  93.6,42.3 270 top
C215  100nF  [CAP0603]  91.8,42.3 90 top
C216  100nF  [CAP0603]  84.6,58.9 0 top
C217  4.7uF  [CAP0603]  97.4,58.4 90 top
C218  10pF  [CAP0603]  88.4,58.4 90 top
C301  100nF  [CAP0603]  63.5,39.3 270 top
C302  100nF  [CAP0603]  77.1,47.5 0 top
C303  100nF  [CAP0603]  67.1,39.3 270 top
C304  100nF  [CAP0603]  55,51 180 top
C305  100nF  [CAP0603]  55,46.4 180 top
C306  100nF  [CAP0603]  55,52.8 180 top
C307  100nF  [CAP0603]  65.2,60.5 90 top
C308  100nF  [CAP0603]  55,54.6 180 top
C309  100nF  [CAP0603]  77.1,52.9 0 top
C310  100nF  [CAP0603]  61.6,60.5 90 top
C311  100nF  [CAP0603]  77.1,51.1 0 top
C312  100nF  [CAP0603]  65.3,39.3 270 top
C313  100nF  [CAP0603]  70.7,39.3 270 top
C314  100nF  [CAP0603]  63.4,60.5 90 top
C315  100nF  [CAP0603]  67,60.5 90 top
C316  100nF  [CAP0603]  61.7,39.3 270 top
C317  100nF  [CAP0603]  68.8,60.5 90 top
C318  100nF  [CAP0603]  77.1,49.3 0 top
C319  100nF  [CAP0603]  77.1,58.9 0 top
C401  100nF  [CAP0603]  35.7,12.5 90 top
C402  100nF  [CAP0603]  57.1,20.5 180 top
C403  100nF  [CAP0603]  71.7,26.1 0 top
C404  100nF  [CAP0603]  57,27.3 180 top
C405  100nF  [CAP0603]  71.7,20.5 0 top
C406  100nF  [CAP0603]  57.1,18.7 180 top
C407  100nF  [CAP0603]  67.4,16.3 270 top
C408  100nF  [CAP0603]  62.2,16.3 270 top
C409  100nF  [CAP0603]  67.5,30 90 top
C410  DNP  [CAP0603]  33.4,12.5 90 top
C411  100nF  [CAP0603]  16.2,19.8 90 top
C412  DNP  [CAP0603]  28.2,12.5 270 top
C413  100nF  [CAP0603]  30.8,15.5 0 top
C414  2.2uF  [CAP0603]  57,30.9 0 top
C415  100nF  [CAP0603]  18,19.8 90 top
C416  12pF  [CAP0603]  48.7,28.6 90 top
C417  12pF  [CAP0603]  48.7,18 90 top
C418  100nF  [CAP0603]  21.1,7.9 270 top
C419  12pF  [CAP0603]  54.5,23.3 270 top
C420  1uF  [CAP0603]  22.9,7.9 270 top
C421  100nF  [CAP0603]  14,15.7 90 top
C422  100nF  [CAP0603]  24.7,7.9 270 top
C423  6.8nF  [CAP0603]  21.6,23.1 90 top
C424  27pF  [CAP0603]  26.5,7.9 270 top
C425  2.2uF  [CAP0603]  51.3,22.4 0 top
C426  100nF  [CAP0603]  51.3,24.2 0 top
C427  27pF  [CAP0603]  28.3,7.9 270 top
C428  330pF  [CAP0603]  19.8,19.8 90 top
C429  100nF  [CAP0603]  37.1,24.2 180 top
C430  100nF  [CAP0603]  37.1,22.4 180 top
C431  100nF  [CAP0603]  23.4,19.8 90 top
C432  330pF  [CAP0603]  13.3,12 180 top
C433  10nF  [CAP0603]  8.5,12 180 top
C501  100nF  [CAP0603]  20.7,85.2 180 top
C502  100nF  [CAP0603]  20.7,83.4 180 top
C503  100nF  [CAP0603]  33.8,90.1 0 top
C504  100nF  [CAP0603]  35.1,62.2 0 top
C505  1uF  [CAP0603]  29.9,54.9 270 top
C506  100nF  [CAP0603]  28.1,54.9 270 top
C507  100nF  [CAP0603]  33.8,93 0 top
C508  100nF  [CAP0603]  22.1,88 180 top
C509  100nF  [CAP0603]  28.3,67.7 90 top
C510  100nF  [CAP0603]  127.8,50.9 0 top
C511  100nF  [CAP0603]  18.7,88 180 top
C512  1.2nF  [CAP0603]  8.5,81.9 180 top
C513  DNP  [CAP0603]  11.9,90.5 180 top
C514  68pF  [CAP0603]  7.6,84.5 90 top
C515  100nF  [CAP0603]  8.5,88 180 top
C516  100nF  [CAP0603]  19.5,61.6 180 top
C517  200pF  [CAP0603]  26.1,72.1 0 top
C518  200pF  [CAP0603]  22.5,72.1 0 top
C519  200pF  [CAP0603]  30.5,72.1 180 top
C520  200pF  [CAP0603]  34.1,72.1 180 top
C521  620pF  [CAP0603]  27,74.7 270 top
C522  620pF  [CAP0603]  21.6,74.7 90 top
C523  620pF  [CAP0603]  29.6,74.7 270 top
C524  620pF  [CAP0603]  35,74.7 90 top
C525  200pF  [CAP0603]  27,78 270 top
C526  200pF  [CAP0603]  21.6,78 90 top
C527  200pF  [CAP0603]  29.6,78 270 top
C528  200pF  [CAP0603]  35,78 90 top
C601  100nF  [CAP0603]  71.6,90.7 0 top
C602  100nF  [CAP0603]  52.2,83.4 270 top
C603  100nF  [CAP0603]  52.2,90 90 top
C604  100nF  [CAP0603]  66.3,89.1 0 top
C605  100nF  [CAP0603]  66.3,84.9 0 top
C606  100nF  [CAP0603]  66.3,87 180 top
C607  100nF  [CAP0603]  64.9,79.9 270 top
C608  10pF  [CAP0603]  63.1,79.9 270 top
C609  100nF  [CAP0603]  61.3,79.9 270 top
C610  10pF  [CAP0603]  59.5,79.9 270 top
C611  100nF  [CAP0603]  55.9,79.9 270 top
C612  10pF  [CAP0603]  54.1,79.9 270 top
C613  0.4pF  [CAP0603]  45.5,88.4 90 top
C614  0.4pF  [CAP0603]  45.5,85 90 top
C615  39nF  [CAP0603]  57.8,93 90 top
C616  2.7nF  [CAP0603]  54.2,93 90 top
C617  1.3pF  [CAP0603]  42.9,89.4 0 top
C618  1.3pF  [CAP0603]  42.9,84 180 top
C619  1.2nF  [CAP0603]  55.1,95.6 180 top
C620  0.4pF  [CAP0603]  39.5,89.4 0 top
C621  0.4pF  [CAP0603]  39.5,84 180 top
C622  100nF  [CAP0603]  36.1,87.6 180 top
C623  100nF  [CAP0603]  36.1,85.8 180 top
C701  100nF  [CAP0603]  117.6,31 180 top
C702  100nF  [CAP0603]  123,38.7 90 top
C703  100nF  [CAP0603]  124.8,38.7 90 top
C704  100nF  [CAP0603]  133.1,30.3 0 top
C705  100nF  [CAP0603]  122.4,25.2 270 top
C706  100nF  [CAP0603]  86.5,16.6 90 top
C707  4.7uF  [CAP0603]  126,25.2 270 top
C708  10nF  [CAP0603]  133.1,32.1 0 top
C709  10nF  [CAP0603]  133.1,33.9 0 top
C710  4.7uF  [CAP0603]  124.2,25.2 270 top
C711  4.7uF  [CAP0603]  133.1,28.5 0 top
C712  1uF  [CAP0603]  121.4,19.9 270 top
C713  1uF  [CAP0603]  136.5,19.9 270 top
C714  1uF  [CAP0603]  128.6,19.9 270 top
C715  1uF  [CAP0603]  143.5,19.9 270 top
C716  22nF  [CAP0603]  106.5,19.9 90 top
C717  22nF  [CAP0603]  113.5,19.9 90 top
C718  1uF  [CAP0603]  99,16.6 270 top
C719  1uF  [CAP0603]  125,19.9 270 top
C720  100nF  [CAP0603]  97.2,16.6 270 top
C721  220pF  [CAP0603]  119.6,16.6 90 top
C722  220pF  [CAP0603]  134.7,16.6 90 top
C723  220pF  [CAP0603]  104.7,16.6 90 top
C724  220pF  [CAP0603]  130.4,16.6 90 top
C725  220pF  [CAP0603]  145.3,16.6 90 top
C726  220pF  [CAP0603]  115.3,16.6 90 top
C801  100uF  [CAP1206]  137.3,30.3 270 top
C901  100nF  [CAP0603]  86.3,77.1 180 top
C902  100nF  [CAP0603]  98.8,81.3 0 top
C903  DNP  [CAP0603]  99.3,86 90 top
C904  100nF  [CAP0603]  93.4,74.1 270 top
C905  100nF  [CAP0603]  91.6,74.1 270 top
C906  DNP  [CAP0603]  93.7,86 90 top
C907  100nF  [CAP0603]  98.8,79.5 0 top
C1001  100nF  [CAP0603]  123.7,74.6 180 top
C1002  100nF  [CAP0603]  121.4,88.3 270 top
C1003  4.7uF  [CAP0603]  123.7,72.8 180 top
C1004  4.7uF  [CAP0603]  123.2,88.3 270 top
C1005  470pF  [CAP0603]  121.4,85 270 top
C1006  100nF  [CAP0603]  123.7,67.2 180 top
C1007  100uF  [CAP1206]  122.8,69.5 180 top
C1008  470pF  [CAP0603]  129.1,80.1 90 top
C1009  10nF  [CAP0603]  131.1,84.6 270 top
C1010  100nF  [CAP0603]  106.9,87.8 90 top
C1011  100nF  [CAP0603]  128.8,84.6 270 top
C1012  470pF  [CAP0603]  130.9,80.1 90 top
C1013  100uF  [CAP1206]  109.2,88.7 90 top
C1014  100uF  [CAP1206]  129.9,90.3 0 top
C1015  100nF  [CAP0603]  136,67.2 0 top
C1016  100uF  [CAP1206]  136.9,69.5 0 top
C1017  100nF  [CAP0603]  135.8,72.8 0 top
C1018  4.7uF  [CAP0603]  135.8,74.6 0 top
C1019  10nF  [CAP0603]  124,92.8 0 top
C1020  100nF  [CAP0603]  124,94.6 0 top
C1021  1uF  [CAP0603]  10.2,71.8 0 top
C1022  4.7uF  [CAP0603]  48.7,73.7 270 top
C1023  4.7uF  [CAP0603]  27.5,33.4 0 top
C1024  1uF  [CAP0603]  129.1,44.4 180 top
C1025  1uF  [CAP0603]  86.6,87.8 90 top
C1026  10uF  [CAP0603]  8.5,80.1 180 top
C1027  1uF  [CAP0603]  132.7,40 90 top
C1028  1uF  [CAP0603]  78.1,87.8 90 top
C1029  4.7uF  [CAP0603]  42.9,73.7 270 top
C1030  4.7uF  [CAP0603]  27.5,27.6 0 top
CON301  FPC-40P  [FPC-40P]  4.3,50 270 top
D101  LED0603  [0603]  110.3,62.5 180 top
D201  LED0603  [0603]  101.2,62.5 0 top
D301  RGBLED  [5050]  61,70 180 top
D401  BAV99  [SOT23]  10.9,9 90 top
D501  LED0603  [0603]  11.9,80.1 0 top
D701  SP0503BAHT  [SOT143]  92.2,12.6 270 top
D702  LED0603  [0603]  82.9,16.6 90 top
D1001  SP0503BAHT  [SOT143]  135.7,91.6 270 top
D1002  LED0603  [0603]  132.4,94.6 180 top
D1003  LED0603  [0603]  145.1,68.8 0 top
F1001  [1206]  135.1,87.5 0 top
J701  TRSJACK  [3.5TRSJACK]  125,0 90 top
J702  TRSJACK  [3.5TRSJACK]  140,0 90 top
J703  TRSJACK  [3.5TRSJACK]  110,0 90 top
L201  470 Ohms  [IND0603]  90,42.3 270 top
L202  470 Ohms  [IND0603]  84.6,57.1 180 top
L203  10uH  [IND0603]  95.6,58.4 270 top
L401  150nH  [IND0603]  17.7,15.7 270 top
L402  150nH  [IND0603]  15.9,15.7 270 top
L403  8.2nH  [IND0603]  16.8,12 180 top
L501  470nH  [IND0603]  9.4,84.5 270 top
L502  1.3uH  [IND0603]  25.2,74.7 90 top
L503  1.3uH  [IND0603]  23.4,74.7 90 top
L504  1.3uH  [IND0603]  31.4,74.7 90 top
L505  1.3uH  [IND0603]  33.2,74.7 90 top
L506  1.3uH  [IND0603]  25.2,78 90 top
L507  1.3uH  [IND0603]  23.4,78 90 top
L508  1.3uH  [IND0603]  31.4,78 90 top
L509  1.3uH  [IND0603]  33.2,78 90 top
L601  19nH  [IND0603]  47.3,88.4 270 top
L602  19nH  [IND0603]  47.3,85 270 top
L603  2.7nH  [IND0603]  42.9,87.6 180 top
L604  2.7nH  [IND0603]  42.9,85.8 180 top
L605  2.7nH  [IND0603]  39.5,87.6 180 top
L606  2.7nH  [IND0603]  39.5,85.8 180 top
L701  600 Ohms  [IND0603]  121.4,16.6 90 top
L702  600 Ohms  [IND0603]  136.5,16.6 90 top
L703  600 Ohms  [IND0603]  106.5,16.6 90 top
L704  600 Ohms  [IND0603]  113.5,16.6 90 top
L705  600 Ohms  [IND0603]  128.6,16.6 90 top
L706  600 Ohms  [IND0603]  143.5,16.6 90 top
L1001  2.2uH  [IND0805]  127.7,69.5 0 top
L1002  2.2uH  [IND2520]  112.3,88.7 180 top
L1003  350nH  [IND0805]  129.9,87.5 180 top
L1004  2.2uH  [IND2520]  132,69.5 270 top
L1005  350nH  [IND0603]  121.4,93.7 90 top
Q801  AO3400  [SOT23]  141.7,34.5 90 top
Q802  AO3400  [SOT23]  145.4,34.5 90 top
R101  4.7K Ohms  [RES0603]  127.8,59.9 180 top
R102  4.7K Ohms  [RES0603]  127.8,58.1 180 top
R103  330 Ohms  [RES0603]  110.3,60.7 0 top
R104  4.7K Ohms  [RES0603]  117.6,32.8 0 top
R105  4.7K Ohms  [RES0603]  117.6,34.6 0 top
R106  10K Ohms  [RES0603]  139,59.1 90 top
R201  5.62K Ohms  [RES0603]  90.2,58.4 270 top
R202  2.2 Ohms  [RES0603]  93.8,58.4 270 top
R203  330 Ohms  [RES0603]  101.2,60.7 180 top
R204  10K Ohms  [RES0603]  139,44.1 90 top
R301  100K Ohms  [RES0603]  68.9,39.3 90 top
R302  330 Ohms  [RES0603]  67.8,70 180 top
R303  330 Ohms  [RES0603]  67.8,68.3 180 top
R304  330 Ohms  [RES0603]  67.8,71.7 180 top
R305  100K Ohms  [RES0603]  77.1,57.1 180 top
R401  100K Ohms  [RES0603]  65.6,16.3 90 top
R402  0 Ohms  [RES0603]  32.4,8 0 top
R403  1K Ohms  [RES0603]  57,29.1 0 top
R404  220 Ohms  [RES0603]  45,9.9 0 top
R405  220 Ohms  [RES0603]  45,8.1 0 top
R406  25 Ohms  [RES0603]  47.9,26 0 top
R407  25 Ohms  [RES0603]  47.9,20.6 0 top
R408  4.7K Ohms  [RES0603]  41.7,8.1 180 top
R409  1.8K Ohms  [RES0603]  21.6,19.8 90 top
R410  4.7K Ohms  [RES0603]  41.7,9.9 180 top
R411  25 Ohms  [RES0603]  47.9,24.2 180 top
R412  25 Ohms  [RES0603]  47.9,22.4 0 top
R413  DNP  [RES0603]  31.7,21.6 135 top
R414  10K Ohms  [RES0603]  25.2,19.8 270 top
R415  220 Ohms  [RES0603]  29.2,20.4 45 top
R416  220 Ohms  [RES0603]  30.5,19.1 45 top
R501  100K Ohms  [RES0603]  20.7,81.6 0 top
R502  0 Ohms  [RES0603]  38.9,62.2 180 top
R503  100K Ohms  [RES0603]  118.4,77.2 0 top
R504  200 Ohms  [RES0603]  127.8,52.7 0 top
R505  100K Ohms  [RES0603]  118.4,75.4 0 top
R506  DNP  [RES0603]  19.6,90.6 270 top
R507  DNP  [RES0603]  15.3,90.5 0 top
R508  510 Ohms  [RES0603]  11.9,81.9 180 top
R509  49.9 Ohms  [RES0603]  26.1,70.3 180 top
R510  49.9 Ohms  [RES0603]  22.5,70.3 180 top
R511  49.9 Ohms  [RES0603]  30.5,70.3 0 top
R512  49.9 Ohms  [RES0603]  34.1,70.3 0 top
R513  10K Ohms  [RES0603]  19.8,78 270 top
R514  10K Ohms  [RES0603]  36.8,78 270 top
R515  100 Ohms  [RES0603]  26.1,81.9 315 top
R516  100 Ohms  [RES0603]  30.5,81.9 225 top
R601  100K Ohms  [RES0603]  74.8,87.8 90 top
R602  100K Ohms  [RES0603]  66.3,83.1 180 top
R603  5.1K Ohms  [RES0603]  57.7,79.9 90 top
R604  100 Ohms  [RES0603]  49.1,86.7 90 top
R605  DNP  [RES0603]  59.6,93 270 top
R606  360 Ohms  [RES0603]  61.4,93 90 top
R607  680 Ohms  [RES0603]  56,93 270 top
R701  5.1K Ohms  [RES0603]  98,9.4 180 top
R702  5.1K Ohms  [RES0603]  92,9.4 0 top
R703  10K Ohms  [RES0603]  133.1,35.7 0 top
R704  510 Ohms  [RES0603]  84.7,16.6 270 top
R705  24K Ohms  [RES0603]  88.3,16.6 270 top
R706  47K Ohms  [RES0603]  90.1,16.6 90 top
R707  10K Ohms  [RES0603]  94.7,29.1 90 top
R708  100 Ohms  [RES0603]  104.7,19.9 90 top
R709  2.21K Ohms  [RES0603]  123.2,19.9 90 top
R710  4.7K Ohms  [RES0603]  119.6,19.9 270 top
R711  4.7K Ohms  [RES0603]  134.7,19.9 270 top
R712  10K Ohms  [RES0603]  100.8,16.6 270 top
R713  2.21K Ohms  [RES0603]  126.8,19.9 90 top
R714  4.7K Ohms  [RES0603]  130.4,19.9 270 top
R715  4.7K Ohms  [RES0603]  145.3,19.9 270 top
R716  100 Ohms  [RES0603]  115.3,19.9 90 top
R801  22 Ohms  [RES0603]  140.4,30.4 180 top
R802  10K Ohms  [RES0603]  140.4,28.6 0 top
R803  0 Ohms  [RES0603]  140.9,38.2 180 top
R804  0 Ohms  [RES0603]  144.5,38.2 180 top
R805  100K Ohms  [RES0603]  127.8,49.1 180 top
R901  100K Ohms  [RES0603]  83,80.1 270 top
R902  100K Ohms  [RES0603]  101.7,74.1 270 top
R903  100K Ohms  [RES0603]  103.5,74.1 270 top
R904  0 Ohms  [RES0603]  88,74.1 90 top
R905  0 Ohms  [RES0603]  84.4,74.1 90 top
R906  0 Ohms  [RES0603]  97.3,74.1 90 top
R907  0 Ohms  [RES0603]  86.2,74.1 90 top
R908  0 Ohms  [RES0603]  82.6,74.1 90 top
R909  0 Ohms  [RES0603]  99.1,74.1 90 top
R1001  5.1K Ohms  [RES0603]  139.9,89.2 270 top
R1002  5.1K Ohms  [RES0603]  139.9,85.8 90 top
R1003  274K Ohms  [RES0603]  123.7,77.2 180 top
R1004  294K Ohms  [RES0603]  123.7,79 0 top
R1005  100K Ohms  [RES0603]  123.7,80.8 180 top
R1006  100K Ohms  [RES0603]  118.4,80.8 0 top
R1007  309K Ohms  [RES0603]  113.1,85.3 180 top
R1008  64.9K Ohms  [RES0603]  113.1,83.3 0 top
R1009  100K Ohms  [RES0603]  139.2,77.2 180 top
R1010  309K Ohms  [RES0603]  135.8,77.2 0 top
R1011  71.5K Ohms  [RES0603]  135.8,79 180 top
R1012  510 Ohms  [RES0603]  129,94.6 180 top
R1013  330 Ohms  [RES0603]  145.1,70.6 180 top
R1014  100K Ohms  [RES0603]  10.2,70 0 top
R1015  820 Ohms  [RES0603]  13.7,76.1 90 top
R1016  100K Ohms  [RES0603]  118.4,79 0 top
RFCON401  RFCON-SMA-EDGE  [SMA-EDGE]  3.3,12 90 top
RFCON501  RFCON-SMA-EDGE  [SMA-EDGE]  3.3,88 90 top
RFCON502  RFCON-U.FL  [U.FL]  25,93.6 180 top
SJ201  [SJ_S]  147.9,44.1 90 top
TC101  TC2050-IDC  [TC2050-IDC]  144,60 90 top
TC201  TC2050-IDC  [TC2050-IDC]  144,45 90 top
TP1  TESTPOINT-0.7MM  [PAD0.7MM]  100.7,55.8 0 top
TP2  TESTPOINT-0.7MM  [PAD0.7MM]  100.4,50 0 top
TP3  TESTPOINT-0.7MM  [PAD0.7MM]  71.4,59.6 0 top
TRF401  ETC1-1T-2TR  [TRF-SM-22]  42.4,23.3 270 top
U101  EFM32GG11B420F2048GL112  [BGA112]  119.2,54.5 0 top
U201  ATSAMS70Q21B-C  [LFBGA144]  92.9,50.4 0 top
U301  ICE40HX8K-CT256  [CABGA256]  66.1,50 0 top
U302  SST26VF064B  [WSOIC8]  81.1,63.15 90 top
U401  DSC1211DE3-C0017  [VDFN6]  36.3,8.8 270 top
U402  LTC2206  [QFN48]  64.7,23.3 0 top
U403  R820T2  [QFN24]  23.3,13.3 0 top
U501  ADL5385  [QFN24']  28.3,86.7 180 top
U502  AD9117  [QFN40]  28.3,61.4 90 top
U503  ADL5601  [SOT89]  13.6,86.4 180 top
U601  DSC1201DE3-50M00000  [VDFN6]  71.6,87.8 270 top
U602  ADF4351  [QFN32]  58.7,86.7 270 top
U701  TSCS25A3X1NDGXZAX  [QFN40']  125,32 180 top
U702  CP2615  [QFN32']  95,22.7 90 top
U801  ER-TFT035-6  [FPC-50P]  133,49.5 90 bottom
U901  DSC1201DE3-50M00000  [VDFN6]  86.3,80.1 90 top
U902  SI5351C  [QFN20]  92.6,79.9 270 top
U1001  MIC23155  [DFN10]  117.1,88.2 0 top
U1002  MIC23159  [VQFN20]  130,74.4 90 top
U1003  MIC2019  [SOT23-6]  10.3,76.1 90 top
U1004  ADP150UJZ-1.8  [SOT23-5]  129.1,40 270 top
U1005  ADP150UJZ-3.3  [SOT23-5]  82.1,87.8 180 top
U1006  MIC94305  [DFN6]  45.8,74.5 270 top
U1007  MIC94305  [DFN6]  26.7,30.5 0 top
U$1  [JS_10MM]  41.8,50.8 0 top
U$2  [RADIO_10MM]  70.9,73.6 0 top
USB701  USB-C-16P-SMD-FLAT-SIDE-TYPE-2  [USB-C-16P-SMD-FLAT-SIDE-TYPE-2]  95,1.2 90 top
USB1001  USB-C-16P-SMD-FLAT-SIDE-TYPE-2  [USB-C-16P-SMD-FLAT-SIDE-TYPE-2]  148.8,87.5 180 top
X101  32.768 kHz  [2-SMD-3215]  110.6,50.9 270 top
X401  DNP  [4-SMD-3225]  30.8,12.5 270 top
X901  DNP  [4-SMD-3225]  96.5,86 270 top

## Library data of the parts
C101-C111 C201-C218 C301-C319 C401-C433 C501-C528 C601-C623 C701-C726 C801 C901-C907 C1001-C1030 = Capacitor
CON301 = Generic Connector
D101 D201 D301 D501 D702 D1002 D1003 = LED
D401 = Generic Diode; OCLCSC: C68983
D701 D1001 = TVS
F1001 = PTC Fuses; HOLD: 3A; OCLCSC: C70170; TRIP: 6A
J701-J703 = DC Jack; OCLCSC: C145813
L201 L202 = Inductor; OCMOUSER: 81-BLM18PG471SN1D
L203 = Inductor; OCLCSC: C285968
L401 L402 = Inductor; OCMOUSER: 609-L-14CR15JV4T
L403 = Inductor; OCMOUSER: 81-LQW18AN8N2D00D
L501-L509 L601-L606 L701-L706 TRF401 = Inductor
L1001 = Inductor; CURRENT: 1.2A; OCLCSC: C281115
L1002 L1004 = Inductor; CURRENT: 2.2A; OCLCSC: C375952
L1003 = Inductor; CURRENT: 3A; OCMOUSER: 810-MPZ2012S221AT000
L1005 = Inductor; CURRENT: 1.4A; OCMOUSER: 81-BLM18PG221SN1D
Q801 Q802 = Alpha Omega
R101-R106 R201-R204 R301-R305 R401-R416 R501-R516 R601-R607 R701-R716 R801-R805 R901-R909 R1001-R1016 = Resistor
RFCON401 RFCON501 RFCON502 = RF Connector
SJ201 = Solder Jumper
TC101 TC201 = TagConnect
TP1-TP3 = PADs
U101 = EFM32
U201 U302 U401 U601 U901 U1001-U1003 U1006 U1007 = Microchip
U301 = Lattice
U402 U501-U503 U602 U1004 U1005 = Analog Devices
U403 = Rafael Micro
U701 = Tempo Semiconductor
U702 U902 = Silicon Labs
U801 = BuyDisplay
U$1 U$2 = Silkscreen
USB701 USB1001 = USB Connector
X101 = Crystal; OCLCSC: C164062
X401 X901 = Crystal; OCLCSC: C70562

## Nets
1V2: C303.1 C304.1 C307.1 C308.1 C311.1 C312.1 C315.1 C318.1 C1006.1 C1007.1 L1001.1 R1003.2 U301.A14 U301.E8 U301.F6 U301.F10 U301.K6 U301.K10 U301.L2 U301.L8 U1002.17
1V2_FB: R1003.1 R1004.2 U1002.16
1V2_PGOOD: R1005.1 U101.C11 U1002.15
1V2_SOFTSTART: C1008.1 U1002.14
1V8_CODEC_CLEAN: C702.1 C704.1 C705.1 C1027.1 U701.3 U701.17 U701.33 U701.37 U1004.5
3V3: C101.1 C102.1 C103.1 C104.1 C105.1 C106.1 C107.1 C108.1 C109.1 C110.1 C203.1 C205.1 C207.1 C209.1 C211.1 C213.1 C214.1 C301.1 C302.1 C305.1 C306.1 C309.1 C310.1 C313.1 C314.1 C316.1 C317.1 C319.1 C403.1 C405.1 C407.1 C409.1 C504.1 C506.1 C605.1 C701.1 C703.1 C718.1 C720.1 C801.1 C901.1 C902.1 C904.1 C905.1 C907.1 C1015.1 C1016.1 C1024.1 CON301.1 CON301.20 CON301.21 CON301.40 L1004.2 R101.2 R102.2 R104.2 R105.2 R106.2 R202.2 R204.2 R305.2 R401.2 R408.2 R410.2 R503.2 R505.2 R703.2 R707.2 R712.2 R805.2 R902.2 R903.2 R1005.2 R1006.2 R1009.2 R1010.2 R1013.2 R1016.2 TC101.1 TC201.1 U101.D5 U101.D7 U101.F8 U101.G4 U101.G8 U101.H7 U101.K8 U101.K9 U101.L4 U101.L10 U201.C1 U201.D1 U201.E7 U201.G8 U201.H6 U201.H7 U301.A3 U301.A8 U301.A13 U301.C15 U301.E1 U301.E12 U301.F8 U301.G6 U301.H10 U301.H15 U301.J6 U301.K8 U301.N1 U301.N13 U301.N15 U301.P3 U301.R8 U301.R13 U302.8 U402.24 U402.25 U402.36 U402.37 U402.45 U502.5 U502.17 U602.28 U701.16 U701.28 U702.6 U702.7 U801.1 U801.7 U801.8 U801.9 U801.35 U801.40 U801.41 U801.42 U901.6 U902.10 U902.11 U902.14 U902.18 U902.20 U1002.10 U1004.1 U1004.3
3V3_ANA_RX_CLEAN: C401.1 C404.1 C406.1 C408.1 C411.1 C413.1 C414.1 C418.1 C421.1 C1030.1 R403.1 U401.6 U402.3 U402.4 U402.12 U402.13 U402.14 U403.2 U403.11 U403.18 U403.23 U1007.1 U1007.2
3V3_ANA_TX_CLEAN: C509.1 C1029.1 U502.26 U1006.1 U1006.2
3V3_ANA_TXPLL_CLEAN: C601.1 C602.1 C603.1 C604.1 C1028.1 L601.1 L602.2 U601.6 U602.6 U602.10 U602.16 U602.17 U602.32 U1005.5
3V3_FB: R1010.1 R1011.2 U1002.11
3V3_PGOOD: R1009.1 U101.D10 U1002.12
3V3_SOFTSTART: C1012.1 U1002.13
3V6_ANA: C1010.1 C1013.1 C1022.1 C1023.1 C1025.1 L1002.2 R1007.2 U1001.3 U1005.1 U1005.3 U1006.4 U1006.5 U1006.6 U1007.4 U1007.5 U1007.6
3V6_ANA_FB: R1007.1 R1008.2 U1001.4
3V6_ANA_PGOOD: R1006.1 U101.C10 U1001.5
3V6_ANA_SOFTSTART: C1005.1 U1001.6
5V0: C1001.1 C1002.1 C1003.1 C1004.1 C1011.1 C1014.1 C1017.1 C1018.1 C1019.1 L1003.2 L1005.1 R1012.2 U1001.2 U1001.8 U1001.9 U1002.1 U1002.6 U1002.7 U1002.9 U1002.18 U1002.20
5V0_ANA_TXMIXER_CLEAN: C501.1 C502.1 C503.1 C1020.1 C1021.1 L1005.2 U501.8 U501.9 U501.11 U501.23 U501.24 U1003.1
5V0_ANA_TXPA_CLEAN: C512.1 C514.1 C1026.1 L501.2 R508.2 U1003.6
!CLK_MNGR_IRQ: R903.1 U101.C9 U902.3
!CLK_MNGR_OE: R902.1 U101.A8 U902.7
!CLK_MNGR_REFCLK_STDBY: R901.2 U101.B7 U901.1
!CODEC_RST: R703.1 U101.L11 U701.7
!DSP_IRQ: U101.B2 U201.K12
!DSP_RESET: R204.1 TC201.10 U101.J8 U201.H12
!DSP_SPI_CS: U101.D1 U201.J2
!FPGA_CRESET: R301.2 U101.G2 U301.N11
!FPGA_DSP_IRQ: U201.F1 U301.F16
!FPGA_MEM_CS: R305.1 U301.E14 U302.1
!FPGA_SPI_CS: U101.H1 U301.R12
!FPGA_SRESET: U101.E2 U301.H16
!I2S_BRG_CFG: R707.1 U101.L6 U702.21
!I2S_BRG_RST: R712.1 U101.L8 U702.9
!RXADC_OE: U301.P2 U402.44
!SMC_RESET: R106.1 TC101.10 U101.K6
!TFT_RESET: U101.H11 U801.10
!TFT_SPI_CS: R805.1 U101.J6 U801.38
!TFT_TOUCH_IRQ: U101.J9 U801.46
!TFT_TOUCH_RESET: U101.J10 U801.47
!TXDAC_CS: R503.1 U101.A4 U502.38
!TXPA_OC: R1016.1 U101.B3 U1003.4
!TXPLL_MUTE: R602.2 U101.B6 U602.26
AUDIO_I2C_SCL: R105.1 U101.A11 U701.12 U702.29
AUDIO_I2C_SDA: R104.1 U101.A10 U701.11 U702.30
BRG_I2S_LRCLK: U301.T15 U702.28
BRG_I2S_MCLK: U301.R15 U702.26
BRG_I2S_SCLK: U301.T13 U702.2
BRG_I2S_SDIN: U301.T14 U702.1
BRG_I2S_SDOUT: U301.R14 U702.32
CLK_MNGR_CLK0: R904.2 U902.13
CLK_MNGR_CLK1: R907.2 U902.12
CLK_MNGR_CLK2: R905.2 U902.9
CLK_MNGR_CLK3: R908.2 U902.8
CLK_MNGR_CLK5: R909.2 U902.17
CLK_MNGR_CLK6: R906.2 U902.16
CLK_MNGR_REF: U901.4 U902.6
CLK_MNGR_XTALA: C903.1 U902.1 X901.2
CLK_MNGR_XTALB: C906.1 U902.2 X901.4
CODEC_AFILT1: C709.1 U701.5
CODEC_AFILT2: C708.1 U701.4
CODEC_CAP-: C707.2 U701.35
CODEC_HP_L: C726.1 J703.2 L704.1
CODEC_HP_R: C723.1 J703.3 L703.1
CODEC_I2S_LRCLK: U301.R16 U701.15 U701.19
CODEC_I2S_MCLK: U301.N16 U701.6
CODEC_I2S_SCLK: U301.T16 U701.14 U701.20
CODEC_I2S_SDIN: U301.P15 U701.18
CODEC_I2S_SDOUT: U301.P16 U701.13
CODEC_LINE_L: C725.1 J702.2 L706.1
CODEC_LINE_R: C722.1 J702.3 L702.1
CODEC_MIC_L: C724.1 J701.2 L705.1
CODEC_MIC_R: C721.1 J701.3 L701.1
CODEC_V-: C710.1 U701.34
CODEC_VREF: C711.1 U701.2
CPDEC_CAP+: C707.1 U701.36
DSP_BB_I2S_LRCLK: U201.C2 U301.D15
DSP_BB_I2S_SCLK: U201.H3 U301.E16
DSP_BB_I2S_SDIN: U201.B1 U301.D16
DSP_BB_I2S_SDOUT: U201.A1 U301.C16
DSP_D+: D1001.4 U201.A4 USB1001.A6 USB1001.B6
DSP_D-: D1001.3 U201.B4 USB1001.A7 USB1001.B7
DSP_ERASE: SJ201.1 U201.G12
DSP_I2S_LRCLK: U201.L5 U301.M15
DSP_I2S_MCLK: U201.C11 U301.K15
DSP_I2S_SCLK: U201.D12 U301.L16
DSP_I2S_SDIN: U201.K5 U301.M16
DSP_I2S_SDOUT: U201.A10 U301.K16
DSP_JTAGSEL: TP1.TP U201.B11
DSP_LED: R203.2 U201.A12
DSP_MAIN_CLK: R906.1 U201.A2
DSP_SPI_MISO: U101.C1 U201.K9
DSP_SPI_MOSI: U101.C2 U201.H9
DSP_SPI_SCK: U101.D2 U201.M8
DSP_SWCLK: TC201.4 U201.F9
DSP_SWDIO: TC201.2 U201.J11
DSP_SWO: TC201.6 U201.C10
DSP_TST: TP2.TP U201.H11
DSP_VDDOUT: C201.1 C202.1 C204.1 C206.1 C208.1 C210.1 C212.1 L201.1 L202.1 U201.C3 U201.E8 U201.H5 U201.H8
DSP_VDDPLLUSB: C217.1 L203.2 U201.F8
EXP_IO0: CON301.3 U301.E5
EXP_IO1: CON301.4 U301.E4
EXP_IO2: CON301.5 U301.E3
EXP_IO3: CON301.6 U301.E2
EXP_IO4: CON301.7 U301.F3
EXP_IO5: CON301.8 U301.F2
EXP_IO6: CON301.9 U301.F1
EXP_IO7: CON301.10 U301.G2
EXP_IO8: CON301.11 U301.G1
EXP_IO9: CON301.12 U301.H2
EXP_IO10: CON301.13 U301.H1
EXP_IO11: CON301.14 U301.H3
EXP_IO12: CON301.15 U301.J1
EXP_IO13: CON301.16 U301.J2
EXP_IO14: CON301.17 U301.K1
EXP_IO15: CON301.18 U301.L1
EXP_IO16: CON301.23 U301.K3
EXP_IO17: CON301.24 U301.K4
EXP_IO18: CON301.25 U301.L4
EXP_IO19: CON301.26 U301.L3
EXP_IO20: CON301.27 U301.M1
EXP_IO21: CON301.28 U301.M2
EXP_IO22: CON301.29 U301.M3
EXP_IO23: CON301.30 U301.M4
EXP_IO24: CON301.31 U301.M5
EXP_IO25: CON301.32 U301.L5
EXP_IO26: CON301.33 U301.M6
EXP_IO27: CON301.34 U301.P4
EXP_IO28: CON301.35 U301.P5
EXP_IO29: CON301.36 U301.N6
EXP_IO30: CON301.37 U301.L6
EXP_IO31: CON301.38 U301.N7
FPGA_BLED: R304.1 U301.B16
FPGA_CBSEL0: U101.F2 U301.K11
FPGA_CBSEL1\: U101.G1 U301.P13
FPGA_CDONE: U101.F1 U301.M10
FPGA_CLK1: R905.1 U301.C8
FPGA_CLK2: R907.1 U301.K9
FPGA_CLK3: R904.1 U301.R9
FPGA_CLK4: R908.1 U301.F7
FPGA_GLED: R303.1 U301.A15
FPGA_MEM_IO0: U301.C13 U302.5
FPGA_MEM_IO1: U301.E13 U302.2
FPGA_MEM_IO2: U301.D14 U302.3
FPGA_MEM_IO3: U301.D13 U302.7
FPGA_MEM_SCK: U301.C14 U302.6
FPGA_RLED: R302.1 U301.A16
FPGA_SPI_SCK: U101.J2 U301.R11
FPGA_SPI_SDI: U101.J1 U301.P11
FPGA_SPI_SDO: U101.H2 U301.P12
FPGA_VPP_FAST: TP3.TP U301.D12
GND: C101.2 C102.2 C103.2 C104.2 C105.2 C106.2 C107.2 C108.2 C109.2 C110.2 C111.2 C201.2 C202.2 C203.2 C204.2 C205.2 C206.2 C207.2 C208.2 C209.2 C210.2 C211.2 C212.2 C213.2 C214.2 C215.2 C216.2 C217.2 C218.2 C301.2 C302.2 C303.2 C304.2 C305.2 C306.2 C307.2 C308.2 C309.2 C310.2 C311.2 C312.2 C313.2 C314.2 C315.2 C316.2 C317.2 C318.2 C319.2 C401.2 C402.2 C403.2 C404.2 C405.2 C406.2 C407.2 C408.2 C409.2 C410.2 C411.2 C412.2 C413.2 C414.2 C415.2 C416.2 C417.1 C418.2 C420.2 C421.2 C422.2 C423.2 C424.2 C425.2 C426.2 C427.2 C428.2 C431.2 C501.2 C502.2 C503.2 C504.2 C505.2 C506.2 C507.2 C509.2 C510.2 C512.2 C514.2 C516.2 C517.2 C518.1 C519.2 C520.1 C521.2 C522.1 C523.2 C524.1 C525.2 C526.1 C527.2 C528.1 C601.2 C602.2 C603.2 C604.2 C605.2 C607.2 C608.2 C609.2 C610.2 C611.2 C612.2 C613.2 C614.1 C616.2 C617.2 C618.1 C619.2 C620.2 C621.1 C701.2 C702.2 C703.2 C704.2 C705.2 C706.2 C708.2 C709.2 C710.2 C711.2 C718.2 C719.2 C720.2 C721.2 C722.2 C723.2 C724.2 C725.2 C726.2 C801.2 C901.2 C902.2 C903.2 C904.2 C905.2 C906.2 C907.2 C1001.2 C1002.2 C1003.2 C1004.2 C1005.2 C1006.2 C1007.2 C1008.2 C1009.2 C1010.2 C1011.2 C1012.2 C1013.2 C1014.2 C1015.2 C1016.2 C1017.2 C1018.2 C1019.2 C1020.2 C1021.2 C1022.2 C1023.2 C1024.2 C1025.2 C1026.2 C1027.2 C1028.2 C1029.2 C1030.2 CON301.2 CON301.19 CON301.22 CON301.39 D101.1 D201.1 D301.4 D301.5 D301.6 D401.1 D401.2 D501.1 D701.1 D702.1 D1001.1 D1002.1 D1003.1 J701.1 J702.1 J703.1 Q801.2 Q802.2 R201.1 R301.1 R501.1 R509.1 R510.2 R511.1 R512.2 R601.1 R602.1 R603.1 R606.1 R701.1 R702.1 R706.1 R708.1 R710.1 R711.1 R714.1 R715.1 R716.1 R802.1 R901.1 R1001.1 R1002.1 R1004.1 R1008.1 R1011.1 R1014.1 R1015.1 RFCON401.GND@0 RFCON401.GND@1 RFCON401.GND@2 RFCON401.GND@3 RFCON501.GND@0 RFCON501.GND@1 RFCON501.GND@2 RFCON501.GND@3 RFCON502.P$1 RFCON502.P$2 TC101.3 TC201.3 U101.C7 U101.D4 U101.F9 U101.G3 U101.G9 U101.H6 U101.K4 U101.K7 U101.K10 U101.L7 U201.D2 U201.D5 U201.E5 U201.E6 U201.F5 U201.F6 U201.F7 U201.G4 U201.G5 U201.G6 U201.G7 U301.A4 U301.A12 U301.E7 U301.E15 U301.G7 U301.G8 U301.G9 U301.H7 U301.H8 U301.H9 U301.J7 U301.J8 U301.J9 U301.K2 U301.K7 U301.L15 U301.N8 U301.R7 U301.T4 U301.T12 U302.4 U401.3 U402.5 U402.8 U402.11 U402.15 U402.23 U402.31 U402.38 U402.46 U402.48 U402.49 U403.16 U403.33 U501.4 U501.5 U501.6 U501.15 U501.16 U501.19 U501.20 U501.33 U502.6 U502.19 U502.20 U502.25 U502.31 U502.41 U503.2 U503.4 U601.3 U602.8 U602.9 U602.11 U602.18 U602.21 U602.27 U602.31 U602.33 U701.8 U701.41 U702.3 U702.33 U801.11 U801.12 U801.13 U801.14 U801.15 U801.16 U801.17 U801.18 U801.19 U801.20 U801.21 U801.22 U801.23 U801.24 U801.25 U801.26 U801.27 U801.28 U801.29 U801.30 U801.31 U801.32 U801.43 U801.48 U801.49 U801.50 U901.3 U902.21 U1001.7 U1001.10 U1001.11 U1002.2 U1002.5 U1002.8 U1002.19 U1002.21 U1003.2 U1004.2 U1005.2 U1006.3 U1006.7 U1007.3 U1007.7 USB701.A1/B12 USB701.B1/A12 USB1001.A1/B12 USB1001.B1/A12 X401.1 X401.3 X901.1 X901.3
I2S_BRG_D+: D701.4 U702.4 USB701.A6 USB701.B6
I2S_BRG_D-: D701.3 U702.5 USB701.A7 USB701.B7
I2S_BRG_VBUS: C706.1 D701.2 R704.2 R705.2 USB701.A4/B9 USB701.B4/A9
I2S_BRG_VBUS_DET: R705.1 R706.2 U702.8
N$3: R407.1 R412.1 TRF401.3
N$4: C430.1 TRF401.4
N$5: R406.1 R411.2 TRF401.1
N$6: C508.2 C511.1 R506.2
N$8: C429.1 TRF401.5
N$9: C430.2 R413.1 R416.2
N$10: C429.2 R413.2 R415.2
N$15: C433.2 RFCON401.SIG
N$16: C432.2 C433.1 D401.3
N$17: C432.1 L403.2
N$18: L403.1 U403.24
N$20: C424.1 R405.1 R408.1 U403.6
N$21: C427.1 R404.1 R410.1 U403.7
N$22: C423.1 R409.2
N$23: C507.1 R504.2 U501.10
N$26: R402.2 U401.4
N$27: C431.1 R414.2 U403.14
N$29: R701.2 USB701.B5
N$30: R702.2 USB701.A5
N$37: L1004.1 U1002.4
N$38: C712.2 L701.2 R709.1 R710.2
N$39: C714.2 L705.2 R713.1 R714.2
N$42: C713.2 L702.2 R711.2
N$43: L1001.2 U1002.3
N$44: C715.2 L706.2 R715.2
N$45: C712.1 U701.38
N$46: C713.1 U701.40
N$47: R1001.2 USB1001.B5
N$48: C714.1 U701.39
N$49: R1002.2 USB1001.A5
N$50: C717.1 L704.2 U701.32
N$51: J703.4 U701.29
N$52: C716.2 R708.2
N$53: C717.2 R716.2
N$54: C716.1 L703.2 U701.31
N$55: C719.1 R709.2 R713.2 U701.30
N$56: C715.1 U701.1
N$58: F1001.2 USB1001.A4/B9 USB1001.B4/A9
N$63: C515.2 RFCON501.SIG
N$64: C508.1 U501.7
N$65: L1002.1 U1001.1
N$67: C614.2 L602.1 L604.1 R604.1 U602.13
N$68: C618.2 L604.2 L606.1
N$69: C613.1 L601.2 L603.1 R604.2 U602.12
N$70: C617.1 L603.2 L605.1
N$71: C620.1 C622.1 L605.2
N$72: C621.2 C623.1 L606.2
N$73: C518.2 L503.1 R510.1 U502.29
N$74: C517.1 L502.1 R509.2 U502.28
N$75: C522.2 L503.2 L507.1
N$76: C521.1 L502.2 L506.1
N$77: C505.1 U502.7
N$80: C520.2 L505.1 R512.1 U502.22
N$81: C519.1 L504.1 R511.2 U502.23
N$82: C524.2 L505.2 L509.1
N$83: C523.1 L504.2 L508.1
N$84: C615.2 R605.1 R606.2
N$88: R603.2 U602.22
N$92: C513.1 R507.1
N$93: C1009.1 D1001.2 F1001.1 L1003.1
N$94: R1015.2 U1003.5
N$95: L203.1 R202.1
N$96: C218.1 R201.2 U201.C4
N$97: C215.1 L201.2 U201.J7
N$98: C216.1 L202.2 U201.B3
N$101: Q802.3 R804.1
N$102: Q801.3 R803.1
N$103: Q801.1 Q802.1 R801.1 R802.2
N$104: SJ201.2 TC201.7
N$137: C516.1 U502.34
N$141: D301.2 R302.2
N$142: D301.1 R303.2
N$143: D301.3 R304.2
N$144: D101.2 R103.1
N$145: D201.2 R203.1
N$146: D501.2 R508.1
N$147: D702.2 R704.1
N$148: D1003.2 R1013.1
N$149: D1002.2 R1012.1
RXADC_AIN+: C416.1 C419.1 R406.2 U402.6
RXADC_AIN-: C417.2 C419.2 R407.2 U402.7
RXADC_CLK: U301.P1 U402.10
RXADC_D0: U301.T11 U402.18
RXADC_D1: U301.R10 U402.19
RXADC_D2: U301.T10 U402.20
RXADC_D3: U301.T9 U402.21
RXADC_D4: U301.T8 U402.22
RXADC_D5: U301.T7 U402.26
RXADC_D6: U301.R6 U402.27
RXADC_D7: U301.T6 U402.28
RXADC_D8: U301.R5 U402.32
RXADC_D9: U301.T5 U402.33
RXADC_D10: U301.R4 U402.34
RXADC_D11: U301.R3 U402.35
RXADC_D12: U301.T3 U402.39
RXADC_D13: U301.R2 U402.40
RXADC_D14: U301.T2 U402.41
RXADC_D15: U301.T1 U402.42
RXADC_DITH: U101.K3 U402.17
RXADC_ENC+: C402.1 U402.9
RXADC_GAIN: U101.L3 U402.47
RXADC_OF: U301.R1 U402.43
RXADC_SENSE: R403.2 U402.1
RXADC_SHDN: R401.1 U101.J4 U402.16
RXADC_VCM: C425.1 C426.1 R411.1 R412.2 TRF401.2 U402.2
RXTUNER_DET1: C420.1 U403.4
RXTUNER_DET2: C422.1 U403.5
RXTUNER_I2C_SCL: R405.2 U101.L2
RXTUNER_I2C_SDA: R404.2 U101.K2
RXTUNER_IF_VAGC: R414.1 U101.L5
RXTUNER_IFN: R416.1 U403.12
RXTUNER_IFP: R415.1 U403.13
RXTUNER_PLL_CP: C428.1 R409.1 U403.15
RXTUNER_REFCLK_SEL: U101.J3 U401.1
RXTUNER_TF1N: L401.2 U403.21
RXTUNER_TF1P: L402.2 U403.22
RXTUNER_TF2N: L401.1 U403.19
RXTUNER_TF2P: L402.1 U403.20
RXTUNER_VDD_PLL: C415.1 U403.17
RXTUNER_XTALI: C410.1 R402.1 U403.8 X401.2
RXTUNER_XTALO: C412.1 U403.9 X401.4
SMC_LED: R103.2 U101.B1
SMC_LFXTAL_N: U101.L1 X101.2
SMC_LFXTAL_P: U101.K1 X101.1
SMC_MAIN_CLK: R909.1 U101.L9
SMC_SWCLK: TC101.4 U101.E8
SMC_SWDIO: TC101.2 U101.D8
SMC_SWO: TC101.6 U101.C8
SMC_VCORE: C111.1 U101.F11
SYS_I2C_SCL: R102.1 U101.B9 U801.44 U902.4
SYS_I2C_SDA: R101.1 U101.A9 U801.45 U902.5
TFT_BL_K1: R803.2 U801.2
TFT_BL_K2: R804.2 U801.3
TFT_BL_PWM: R801.2 U101.K11
TFT_DC: U101.J11 U801.37
TFT_SPI_MISO: U101.H5 U801.33
TFT_SPI_MOSI: U101.H4 U801.34
TFT_SPI_SCK: U101.J5 U801.36
TXDAC_AUXI: R513.2 U502.33
TXDAC_AUXQ: R514.2 U502.32
TXDAC_CLKIN: R502.2 U301.D2 U502.18
TXDAC_D0: U301.A7 U502.15
TXDAC_D1: U301.B7 U502.14
TXDAC_D2: U301.A6 U502.13
TXDAC_D3: U301.B6 U502.12
TXDAC_D4: U301.A5 U502.11
TXDAC_D5: U301.B5 U502.10
TXDAC_D6: U301.B4 U502.9
TXDAC_D7: U301.B3 U502.8
TXDAC_D8: U301.A2 U502.4
TXDAC_D9: U301.B2 U502.3
TXDAC_D10: U301.A1 U502.2
TXDAC_D11: U301.B1 U502.1
TXDAC_D12: U301.C2 U502.40
TXDAC_D13: U301.C1 U502.39
TXDAC_DCLK: R502.1 U301.D1 U502.16
TXDAC_RESET: R505.1 U101.A3 U502.35
TXDAC_SCLK: U101.C4 U502.36
TXDAC_SDIO: U101.B4 U502.37
TXMIXER_EN: R501.2 U101.A1 U501.12
TXMIXER_IBBN: C525.1 L506.2 R515.2 U501.14
TXMIXER_IBBP: C526.2 L507.2 R513.1 R515.1 U501.13
TXMIXER_LON: C622.2 U501.22
TXMIXER_LOP: C623.2 U501.21
TXMIXER_OUT: R506.1 RFCON502.P$3
TXMIXER_QBBN: C527.1 L508.2 R516.2 U501.17
TXMIXER_QBBP: C528.2 L509.2 R514.1 R516.1 U501.18
TXMIXER_TEMP: C510.1 R504.1 U101.H10
TXPA_BIAS_EN: R1014.2 U101.C3 U1003.3
TXPA_IN: C511.2 R507.2 U503.1
TXPA_OUT: C513.2 C515.1 L501.1 U503.3
TXPLL_CP_VOUT: C615.1 C616.1 R607.2 U602.7
TXPLL_EN: R601.2 U101.A6 U601.1 U602.4
TXPLL_FASTLOCK_SW: R605.2 U602.5
TXPLL_LE: U101.C5 U602.3
TXPLL_LOCK: U101.C6 U602.25
TXPLL_MUXOUT: U101.A5 U602.30
TXPLL_REF_ACC: C606.2 U602.29
TXPLL_REF_DCC: C606.1 U601.4
TXPLL_SCLK: U101.B5 U602.1
TXPLL_SDATA: U101.D6 U602.2
TXPLL_TEMP: C611.1 C612.1 U602.19
TXPLL_VCOM: C609.1 C610.1 U602.23
TXPLL_VREF: C607.1 C608.1 U602.24
TXPLL_VTUNE: C619.1 R607.1 U602.20

## Tracks (layer width: path | path; a pad name or v marks a point on that pad's centre or on a via)
1V2  (via drill 0.2)
  Top 0.254: U1002.17 127.15,75.15 126.3,76 v124.08,76 R1003.2
  Top 0.305: U301.F10 v67.7,52.4 | U301.E8 v65.3,53.2 | U301.F6 64.08,52 v63.69,52.4 | U301.K6 64.1,48.78 v63.71,48.39 | U301.L8 v65.3,47.6 v65.28,47.6 | U301.L2 v60.5,47.6 | U301.K10 v67.7,48.4 v67.72,48.4 | U301.A14 v70.5,56.8
  Top 0.406: C312.1 v65.3,41.5 | C304.1 55.82,49.92 v55.8,49.9 | C307.1 65.2,58.9 v64.8,58.5 | C308.1 v57,54.6 | v74.9,51.1 C311.1
  Top 0.813: 124.52,69.33 C1007.1 | C307.1 C315.1 | C318.1 C311.1 | C303.1 C312.1
  Top 1.27: L1001.1 C1007.1
  Route15 0.254: v124.08,76 124.08,70.72